# Altium PCB Proyecto_receptaculo_placa_externa_PCB.PcbDoc (part 1 of 2)
Units mm, origin at the board's own origin, x right, y up, seen from the top; angles counter-clockwise.
Board outline 92.2 x 97.18 mm, 4 copper layers (Top Layer, Sources, Ground, Bottom Layer), stack 0.603 mm thick; 84 components, 60 nets, 307 pads, 76 vias.
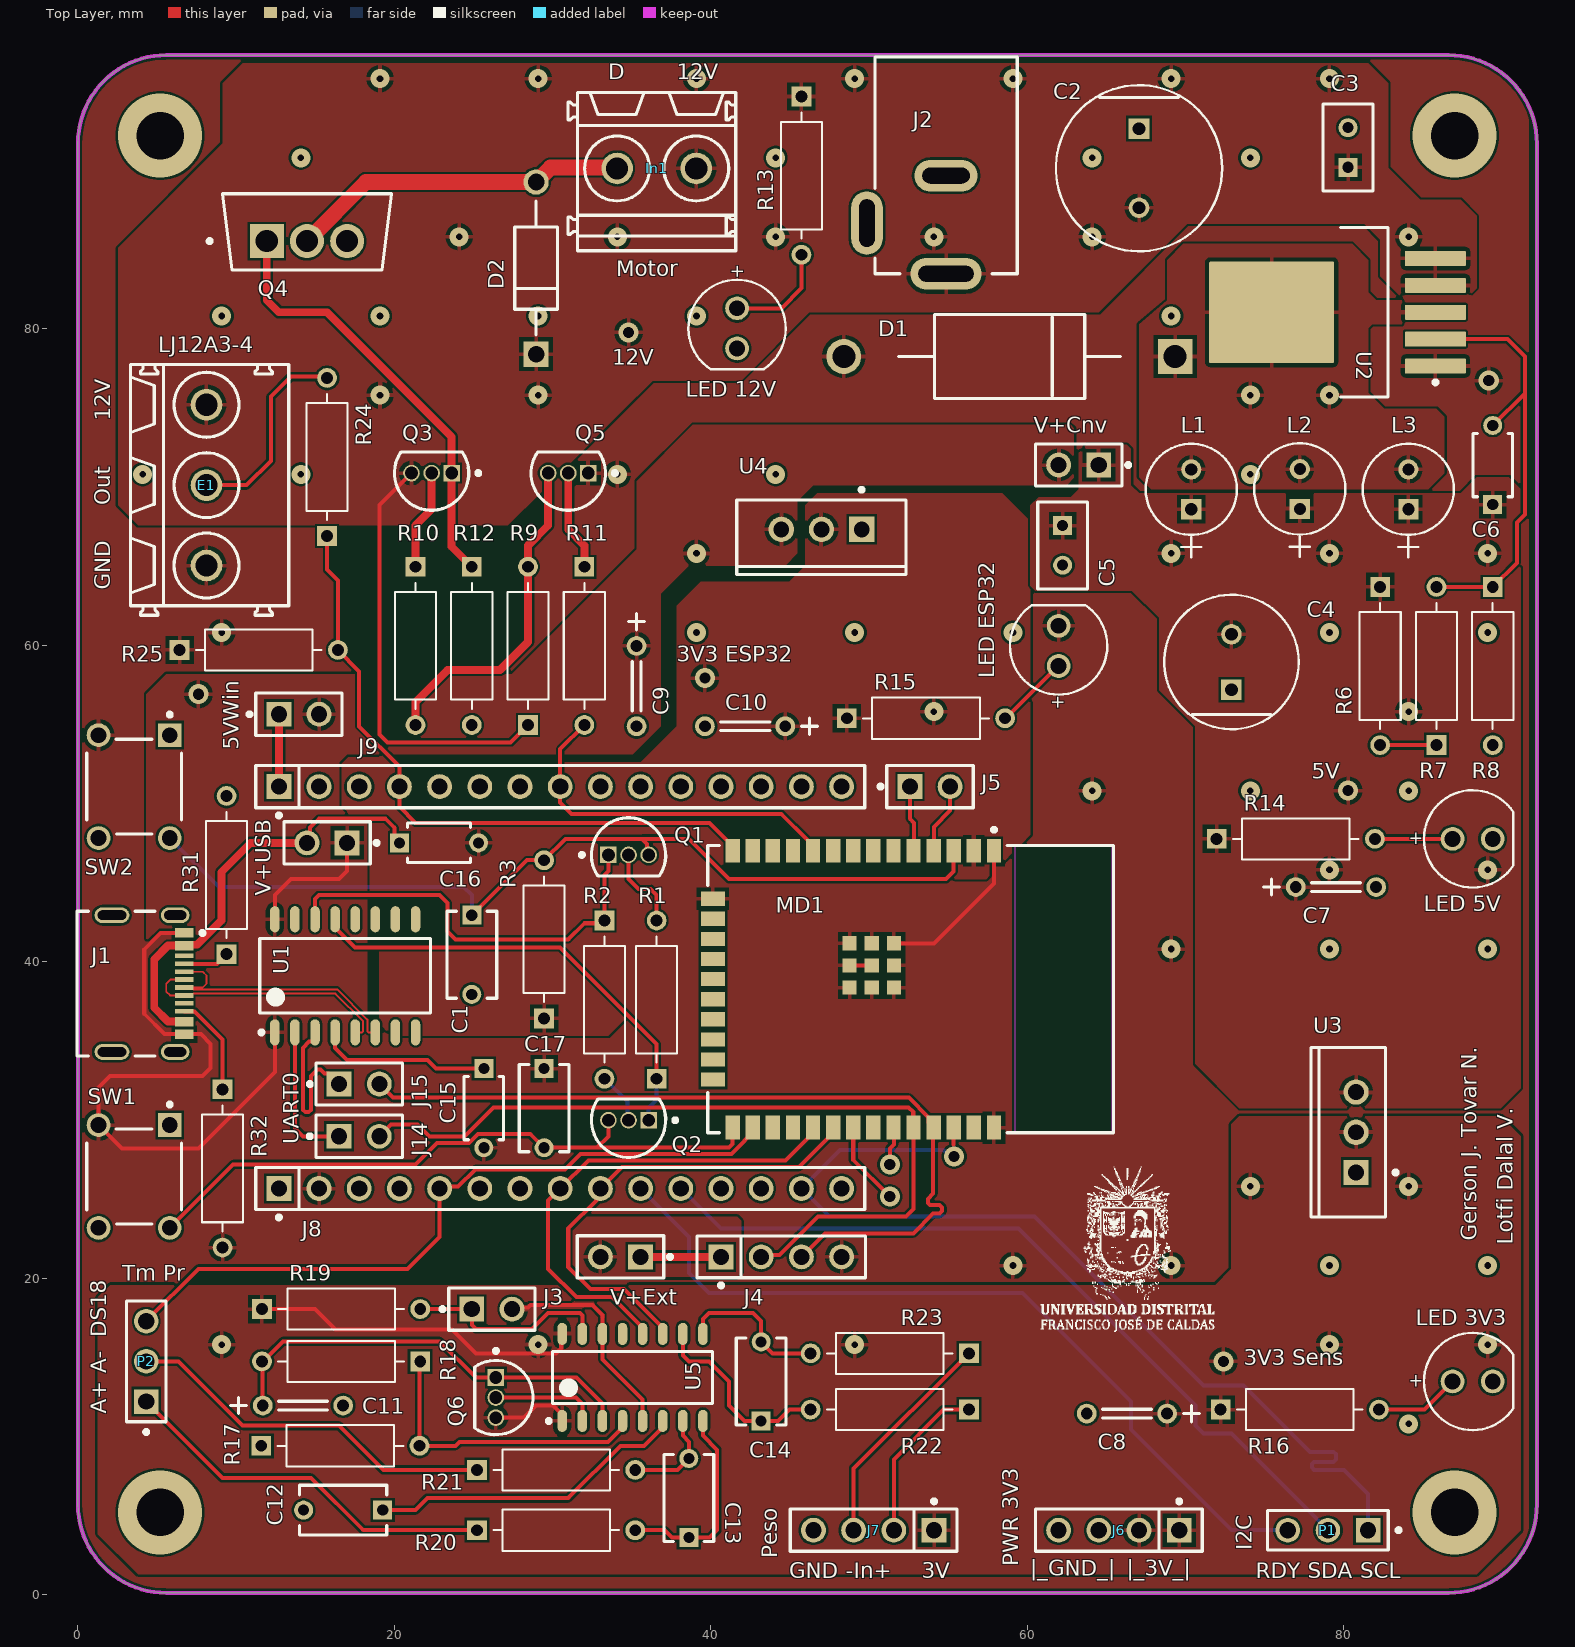
[diagram p0: Top Layer view]
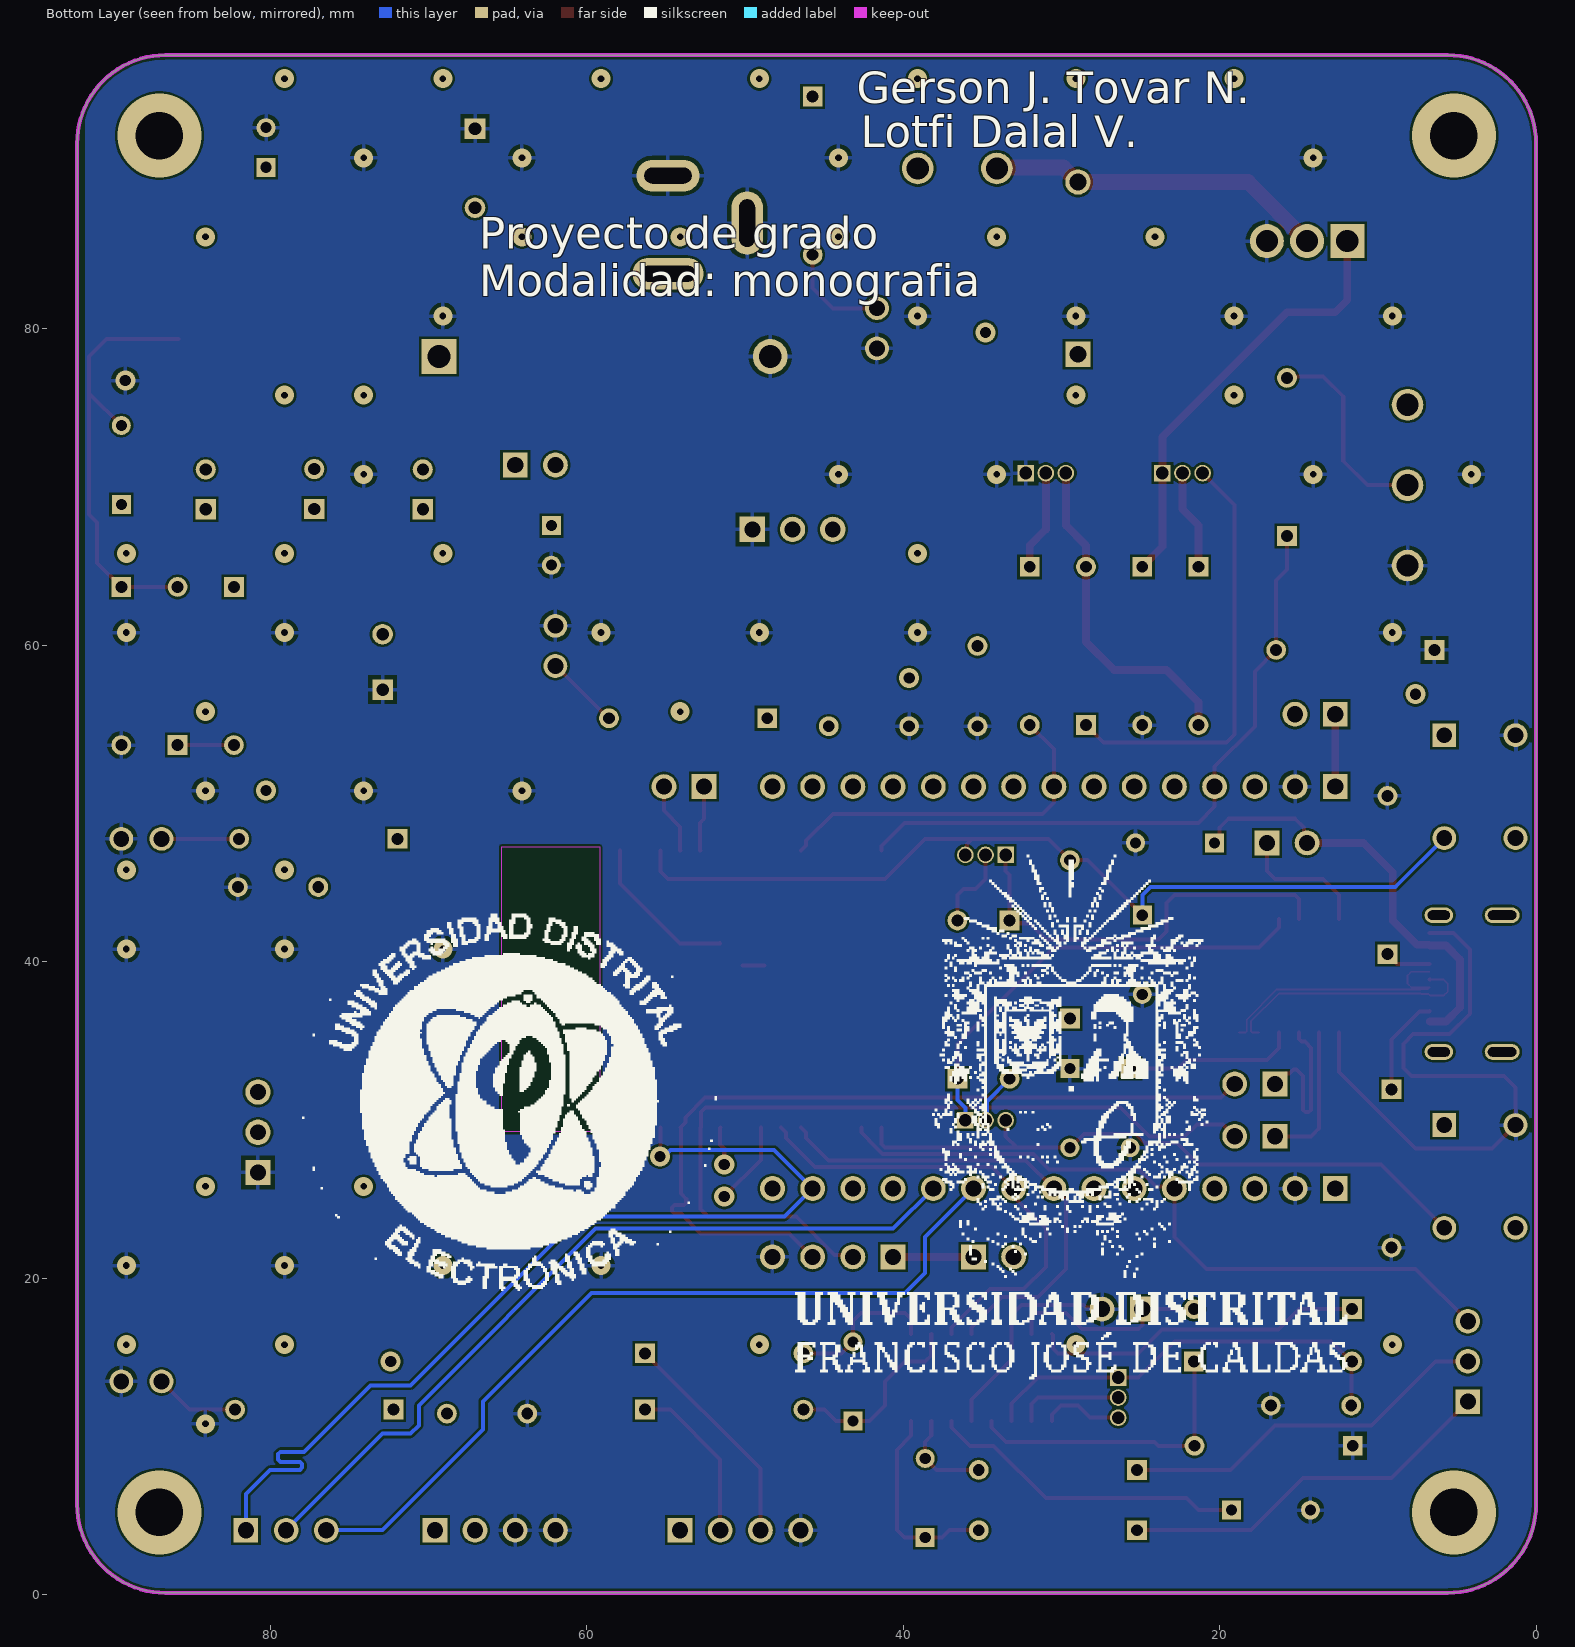
[diagram p1: Bottom Layer view, seen from below]
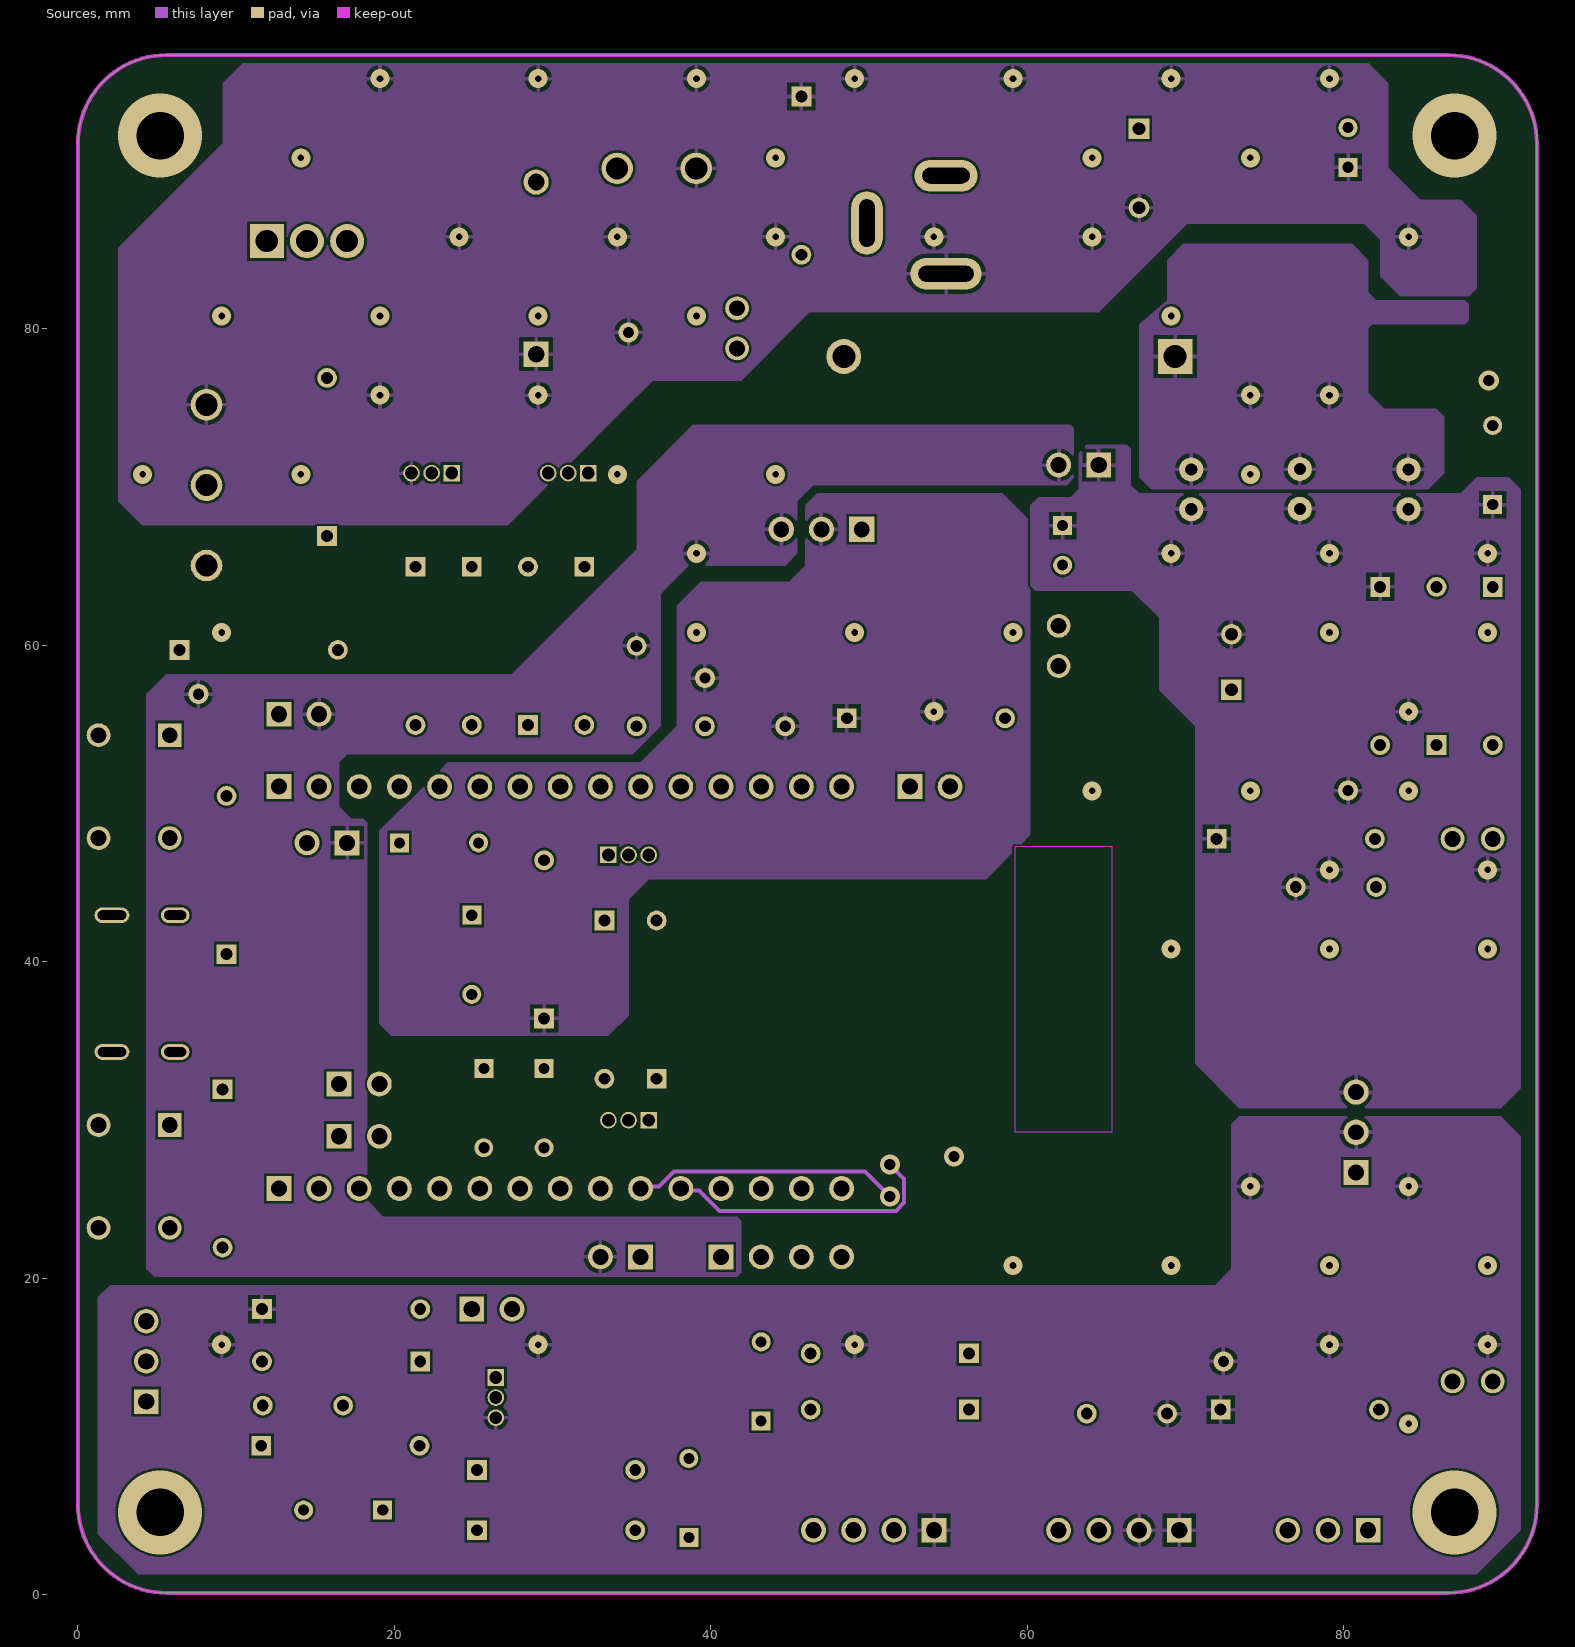
[diagram p2: Sources]
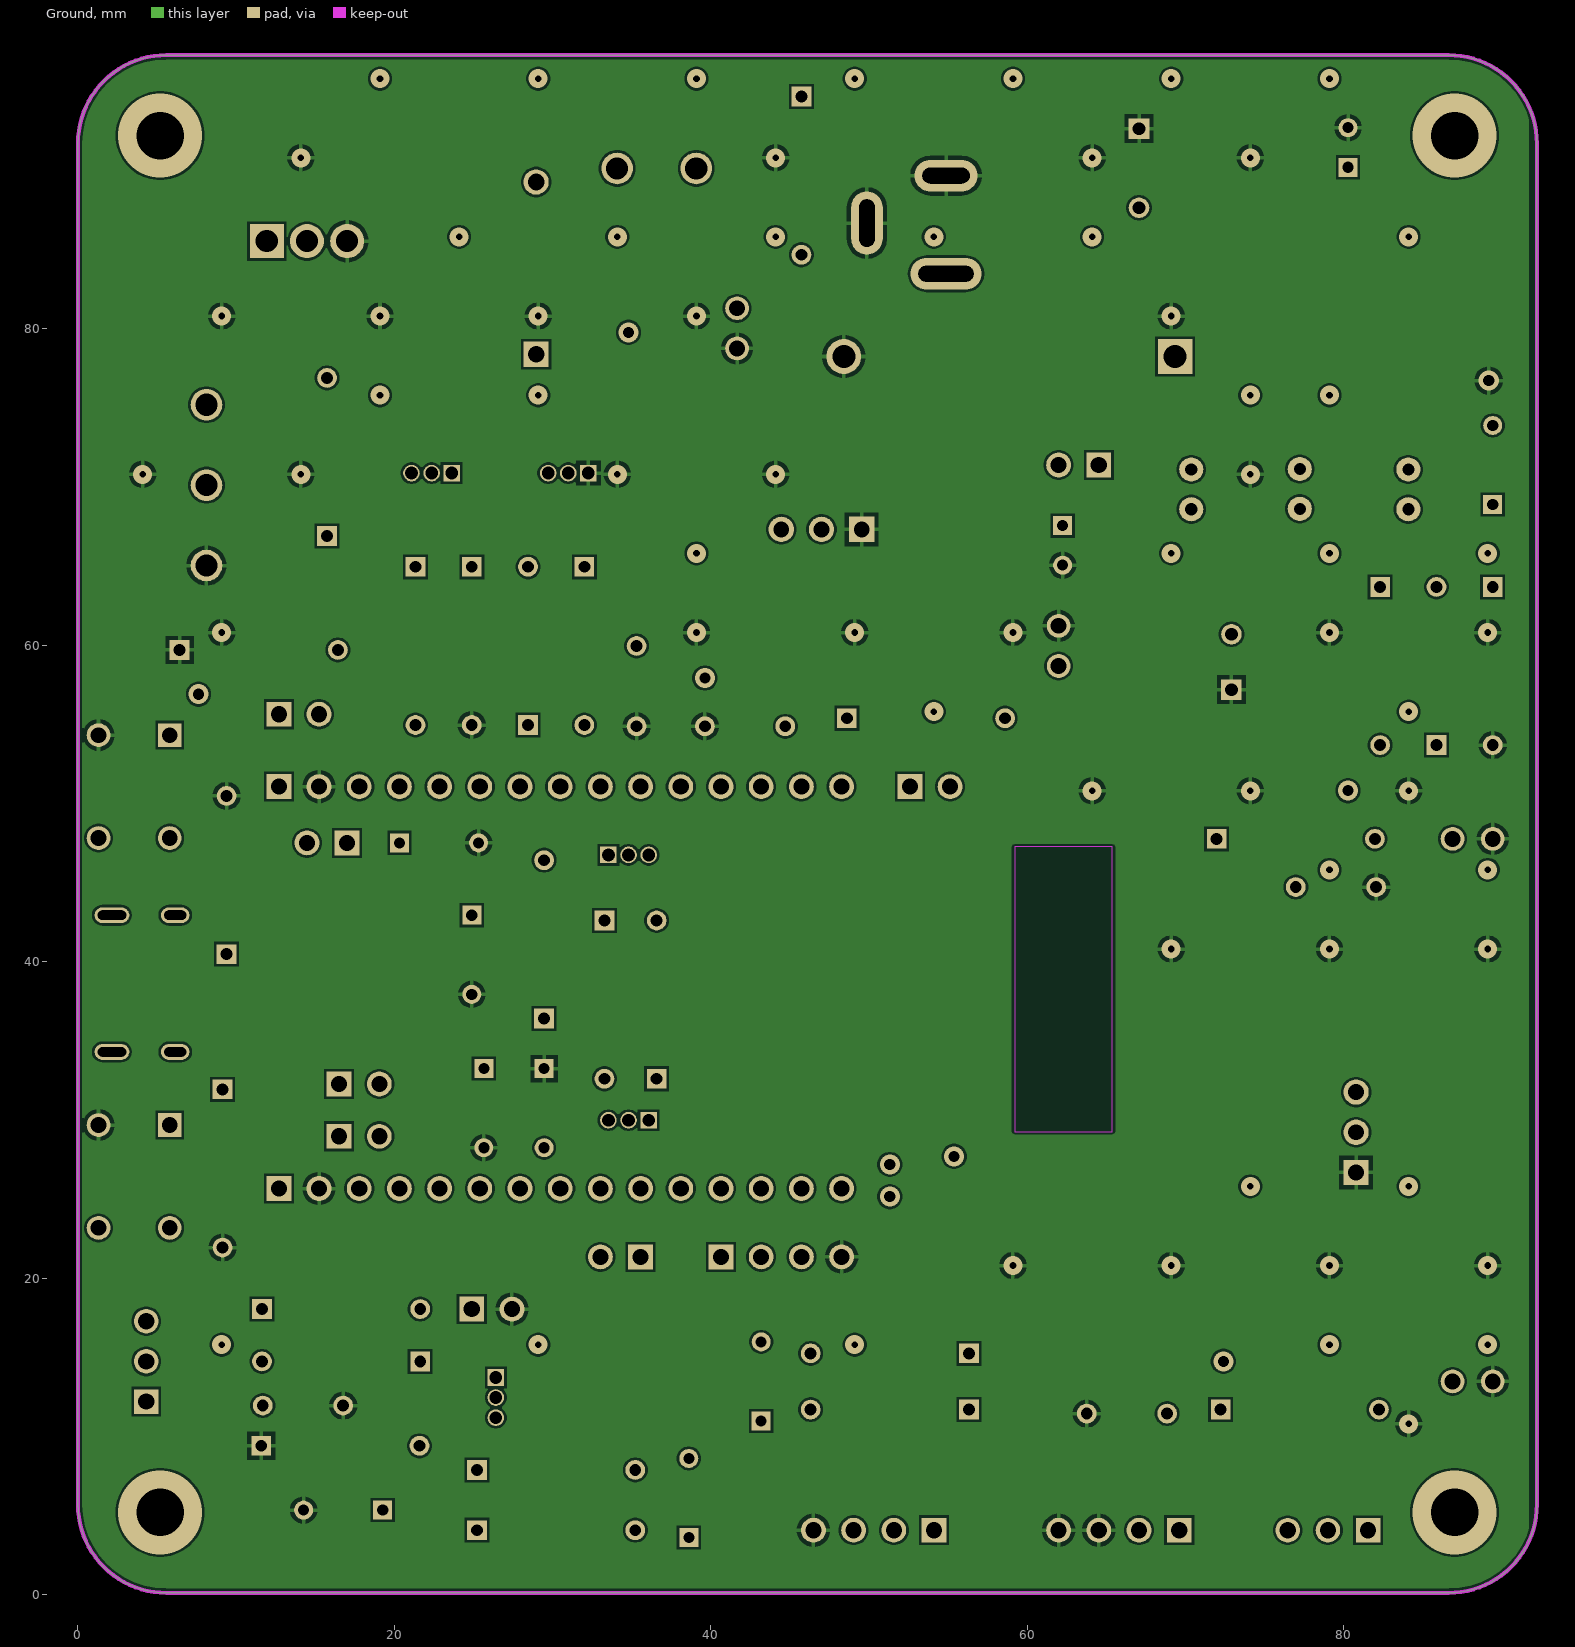
[diagram p3: Ground]
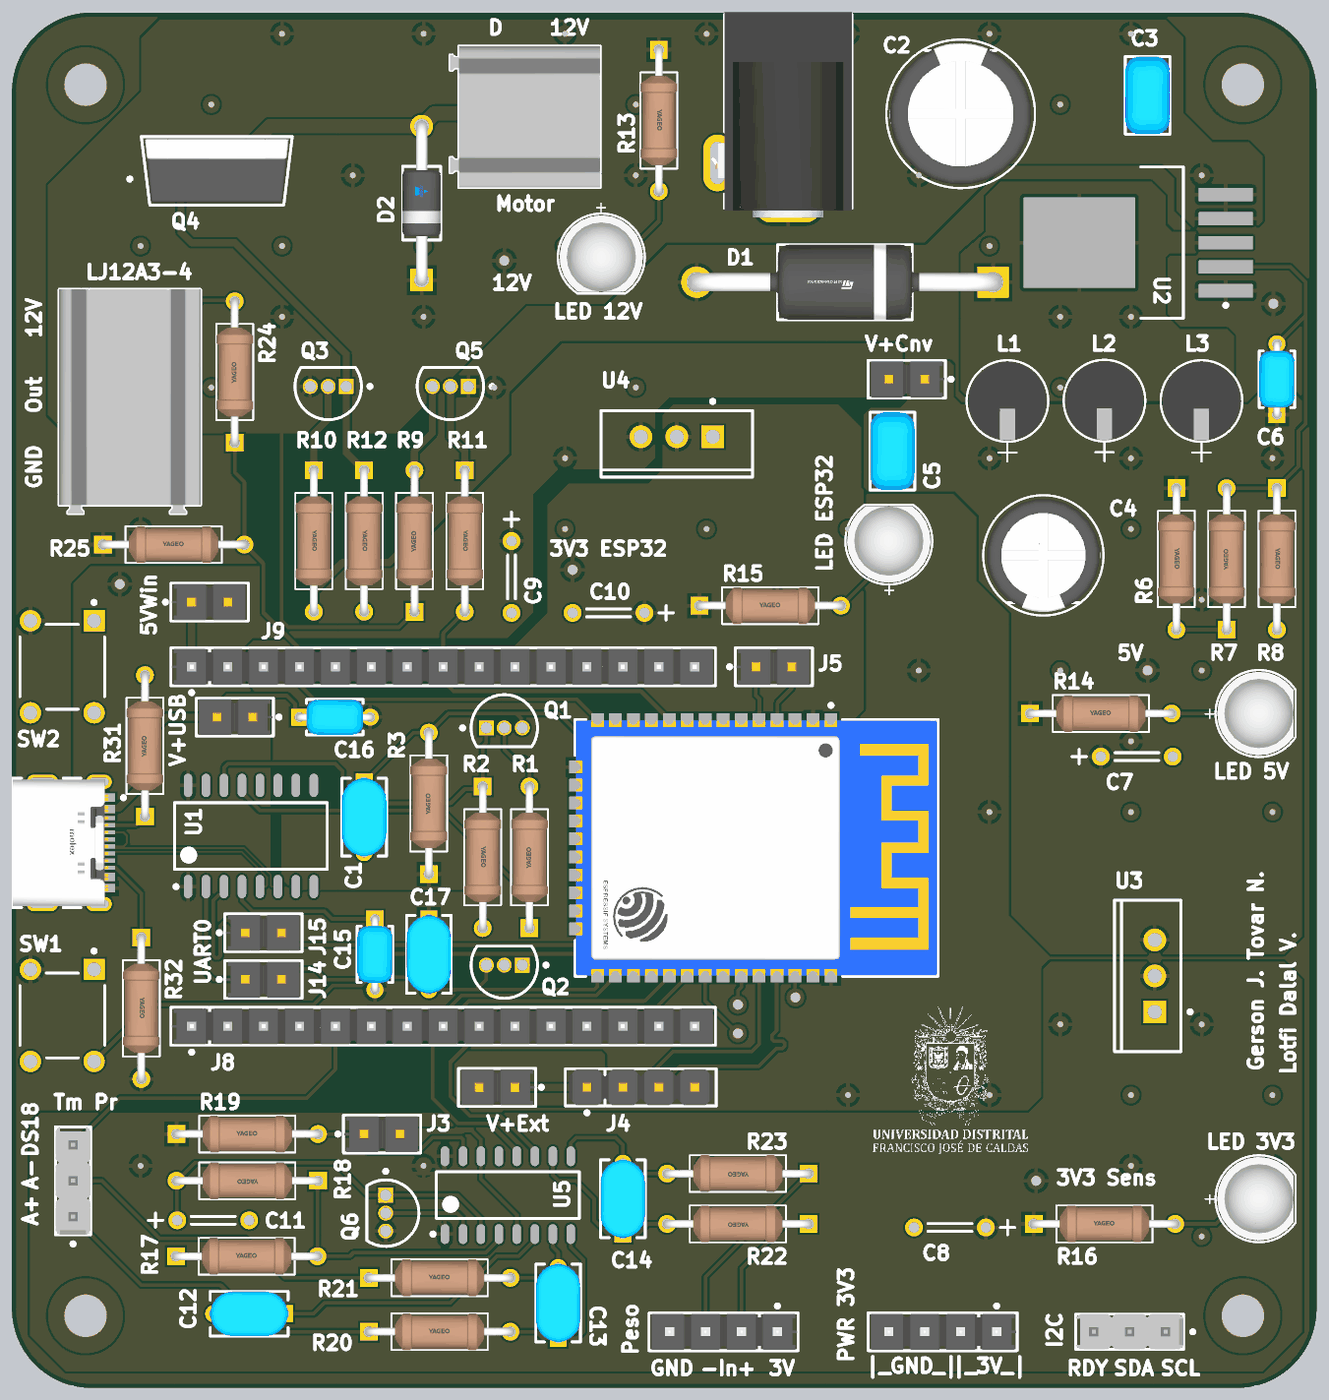
[diagram p4: 3D render of the assembled board from above, using the file's embedded part models]

## Layer stack, top to bottom
Top Solder: solder mask 0.0102, Solder Resist, Dk 3.5
Top Layer: signal copper 0.0356
Dielectric 2: prepreg 0.0711, PP-006, Dk 4.1
Sources: signal copper 0.035
Dielectric 1: dielectric 0.32, FR-4, Dk 4.8
Ground: signal copper 0.035
Dielectric 3: prepreg 0.0711, PP-006, Dk 4.1
Bottom Layer: signal copper 0.0356
Bottom Solder: solder mask 0.0102, Solder Resist, Dk 3.5

## Board outline
5.592,0.102 cw(c5.592,5.69) 0.004,5.69 0.004,91.69 cw(c5.592,91.69) 5.592,97.278 86.614,97.278 cw(c86.614,91.69) 92.202,91.69 92.202,58.42 92.202,5.69 cw(c86.614,5.69) 86.614,0.102

## Design rules (kind name [scope] priority, off if disabled: settings)
Clearance "Stitching GND2" [IsStitchingVia and InNet('GND2') vs (IsVia and (Not IsStitchingVia)) Or IsPad] p1: gap=0.127 ignorepadtopadclearanceinfootprint=TRUE
Clearance "Stitching NetD1_1" [IsStitchingVia and InNet('NetD1_1') vs (IsVia and (Not IsStitchingVia)) Or IsPad] p2: gap=0.127 ignorepadtopadclearanceinfootprint=FALSE
Clearance [All] p3: gap=0.15 ignorepadtopadclearanceinfootprint=TRUE
DiffPairsRouting [All] p1: maxlimit=0.15 minlimit=0.15 mostfreqgap=0.15 toplayer_minwidth=0.117 toplayer_maxwidth=0.117 toplayer_prefwidth=0.117 midlayer1_minwidth=0.064 midlayer1_maxwidth=0.064 midlayer1_prefwidth=0.064 midlayer2_minwidth=0.064 midlayer2_maxwidth=0.064 midlayer2_prefwidth=0.064 bottomlayer_minwidth=0.117 bottomlayer_maxwidth=0.117 bottomlayer_prefwidth=0.117 impedanceprofiledriven=TRUE impedanceprofileid={A861571A-2005-4FA9-A850-810DE9817C21} impedanceprofilevalue=90.000000 maxuncoupledlength=12.7
HoleSize [All] p1: absolutevalues=TRUE maxlimit=5 minlimit=0.3 maxpercent=80.000 minpercent=20.000
MinimumSolderMaskSliver [All] p1: minsoldermaskwidth=0
PasteMaskExpansion [All] p1: expansion=0 thpadusetoppaste=TRUE thpadusebottompaste=TRUE
PolygonConnect [All] p1: connectstyle=Relief reliefconductorwidth=0.254 reliefentries=4 polygonreliefangle="90 Angle" airgapwidth=0.254
RoutingVias [All] p1: holewidth=0.711 width=1.27 viastyle="Through Hole" minholewidth=0.3 minwidth=1.27 maxholewidth=5 maxwidth=5.2
SilkToSilkClearance [All] p1: silktosilkclearance=0
SilkToSolderMaskClearance [IsPad] p1: minsilkscreentomaskgap=0 clearancetoexposedcopper=TRUE
SolderMaskExpansion [InComponent('No Component')] p1: expansion=0.102 istentingtop=TRUE
SolderMaskExpansion SolderMaskExpansion_Vias [IsVia] p2: expansion=0.102 istentingtop=TRUE
SupplyNets "Schematic Supply Nets_9" [InNet('5V_Winner')] p1: voltage=0.000
SupplyNets "Schematic Supply Nets_8" [InNet('VCC_USB')] p2: voltage=0.000
SupplyNets "Schematic Supply Nets_7" [InNet('3V3_LDO_Sens')] p3: voltage=0.000
SupplyNets "Schematic Supply Nets_6" [InNet('GND')] p4: voltage=0.000
SupplyNets "Schematic Supply Nets_5" [InNet('+12_Vin')] p5: voltage=0.000
SupplyNets "Schematic Supply Nets_4" [InNet('3V3_LDO_EPS32')] p6: voltage=0.000
SupplyNets "Schematic Supply Nets_1" [InNet('5V_DC-DC')] p7: voltage=0.000
SupplyNets "Schematic Supply Nets" [InNet('5V_EXTERN')] p8: voltage=0.000
UnRoutedNet [InNet('No Net')] p1:
Width [All] p1: maxlimit=5 minlimit=0.116 preferedwidth=0.254
23 further rules are at their usual default settings.

## Classes and differential pairs
component class Sensores_ADCs_Sheet: C11 C12 C13 C14 E1 J3 J6 J7 P1 P2 Q6 R17 R18 R19 R20 R21 R22 R23 R24 R25 U5
component class ESP32WROOM_Sheet: 5VWin C1 C15 C16 C17 J1 J4 J5 J8 J9 J14 J15 MD1 Q1 Q2 R1 R2 R3 R31 R32 SW1 SW2 U1
component class Driver_Motor_Sheet: D2 In1 Q3 Q4 Q5 R9 R10 R11 R12
component class Alimentacion_Sheet: C2 C3 C4 C5 C6 C7 C8 C9 C10 D1 D3 D4 D5 D6 J2 L1 L2 L3 "LED 3V3" "LED 3V3 ESP32" "LED 5V" "LED 12V" "LED ESP32" R6 R7 R8 R13 R14 R15 R16 U2 U3 U4 V+Cnv V+Ext V+USB

## Components (designator, comment, footprint, x,y, rotation, side; value= is the part's Value field where it differs from the comment)
5VWin "TSW-102-07-L-S" FP-TSW-102-07-L-S-MFG 13.97,55.626 r0 top
C1 "RDER72E104K2K1H03B" FP-RDE2M1-MFG 24.892,40.426 r270 top
C2 "EEUFR1H221B" FP-RAD-TH-D_10_0_5-L_16_1-MFG 67.056,90.13 r270 top
C3 "RCER72A105K2A2H03B" FP-RCE2A2-MFG 80.264,91.44 r90 top
C4 "EEUHD1E331" FP-RAD-TH-D_8_0_5-L_11_5-MFG 72.898,58.928 r90 top
C5 "RCER72A105K2A2H03B" FP-RCE2A2-MFG 62.23,66.294 r270 top
C6 "RCER72A333K1M1H03A" FP-RCE1K1-2_5-MFG 89.408,71.374 r90 top
C7 "T352E475K035AT" KEMT-T352_E_V 79.502,44.704 r0 top
C8 "T352E475K035AT" KEMT-T352_E_V 66.294,11.43 r180 top
C9 "T352E475K035AT" KEMT-T352_E_V 35.306,57.404 r270 top
C10 "T352E475K035AT" KEMT-T352_E_V 42.164,54.864 r180 top
C11 "T352E475K035AT" KEMT-T352_E_V 14.224,11.938 r0 top
C12 "RDER72E104K2K1H03B" FP-RDE2M1-MFG 16.764,5.334 r180 top
C13 "RDER72E104K2K1H03B" FP-RDE2M1-MFG 38.608,6.096 r90 top
C14 "RDER72E104K2K1H03B" FP-RDE2M1-MFG 43.18,13.462 r90 top
C15 "RCER72A104K1K1H03B" FP-RCE1K1-2_5-MFG 25.654,30.734 r270 top
C16 "RCER72A104K1K1H03B" FP-RCE1K1-2_5-MFG 22.82,47.498 r0 top
C17 "RDER72E104K2K1H03B" FP-RDE2M1-MFG 29.464,30.734 r270 top
D1 "1N5822" FP-DO-201AD-MFG 58.872,78.232 r180 top
D2 "1N5819-E3/54" FP-1N5819-E3-54-MFG 28.956,83.82 r90 top
E1 "1716090000" LM_5_08_90_03 8.328,70.104 r270 top
In1 "1715310000" LM_5_00_90_02 36.576,89.916 r180 top
J1 "217179-0001" FP-2171790001-MFG 3.302,38.608 r270 top
J2 "KLDX-0202-B" KYCN-KLDX-0202-B_V 54.864,97.162 r270 top
J3 "TSW-102-07-L-S" FP-TSW-102-07-L-S-MFG 26.162,18.034 r0 top
J4 "M20-9990445" FP-M20-9990445-MFG 44.45,21.336 r0 top
J5 "TSW-102-07-L-S" FP-TSW-102-07-L-S-MFG 53.848,51.054 r0 top
J6 "TSW-104-23-T-S" FP-TSW-104-23-T-S-MFG 65.786,4.064 r180 top
J7 "TSW-104-23-T-S" FP-TSW-104-23-T-S-MFG 50.292,4.064 r180 top
J8 "TSW-115-23-T-S" FP-TSW-115-23-T-S-MFG 30.48,25.654 r0 top
J9 "TSW-115-23-T-S" FP-TSW-115-23-T-S-MFG 30.48,51.054 r0 top
J14 "TSW-102-07-L-S" FP-TSW-102-07-L-S-MFG 17.78,28.956 r0 top
J15 "TSW-102-07-L-S" FP-TSW-102-07-L-S-MFG 17.78,32.258 r0 top
L1 "330 uH" IND_BOURNS_RLB0608 70.358,68.58 r90 top
L2 "330 uH" IND_BOURNS_RLB0608 77.216,68.605 r90 top
L3 "330 uH" IND_BOURNS_RLB0608 84.074,68.58 r90 top
"LED 3V3" "151051BS04000" WL-TMRC_D5.9H8.7 88.138,13.462 r0 top (schematic designator D6)
"LED 5V" "151051BS04000" WL-TMRC_D5.9H8.7 88.138,47.752 r0 top (schematic designator D4)
"LED 12V" "151051BS04000" WL-TMRC_D5.9H8.7 41.656,80.01 r270 top (schematic designator D3)
"LED ESP32" "151051BS04000" WL-TMRC_D5.9H8.7 61.976,59.944 r90 top (schematic designator D5)
MD1 "ESP32-WROOM-32E (16MB)" FP-ESP32-WROOM-32E_16MB-MFG 52.628,38.254 r270 top
P1 "22-28-4033" MOLX-22-28-4033_V 78.994,4.064 r180 top
P2 "22-28-4033" MOLX-22-28-4033_V 4.318,14.732 r90 top
Q1 "2N2222A331" TO-92 34.798,46.736 r0 top
Q2 "2N2222A331" TO-92 34.798,29.972 r180 top
Q3 "BC328" TO-92 22.352,70.866 r180 top
Q4 "IRFZ44NLPBF" FP-PG-TO262-3-MFG 14.478,86.106 r90 top
Q5 "2N2222A331" TO-92 30.988,70.866 r180 top
Q6 "BC328" TO-92 26.416,12.446 r270 top
R1 "FMP100JT-52-1K" FP-FMP100-MFG 36.576,37.592 r90 top
R2 "FMP100JT-52-1K" FP-FMP100-MFG 33.274,37.592 r270 top
R3 "10 kOhms" FP-FMP100-MFG 29.464,41.402 r90 top
R6 "15 kOmhs" FP-FMP100-MFG 82.296,58.674 r270 top
R7 "1 kOhms" FP-FMP100-MFG 85.852,58.674 r90 top
R8 "3 kOhms" FP-FMP100-MFG 89.408,58.674 r270 top
R9 "5.6 kOhms" FP-FMP100-MFG 28.448,59.944 r90 top
R10 "1 kOhms" FP-FMP100-MFG 21.336,59.944 r270 top
R11 "10 kOhms" FP-FMP100-MFG 32.004,59.944 r270 top
R12 "2 kOhms" FP-FMP100-MFG 24.892,59.944 r270 top
R13 "2.2 kOhms" FP-FMP100-MFG 45.72,89.662 r270 top
R14 "1 kOhms" FP-FMP100-MFG 76.962,47.752 r0 top
R15 "1 kOhms" FP-FMP100-MFG 53.594,55.372 r0 top
R16 "1 kOhms" FP-FMP100-MFG 77.216,11.684 r0 top
R17 "3.4 kOhms" FP-FMP100-MFG 16.59,9.398 r0 top
R18 "1 kOhms" FP-FMP100-MFG 16.632,14.732 r180 top
R19 "10 kOhms" FP-FMP100-MFG 16.632,18.034 r0 top
R20 "100 Ohms" FP-FMP100-MFG 30.226,4.064 r0 top
R21 "100 Ohms" FP-FMP100-MFG 30.226,7.874 r0 top
R22 "100 Ohms" FP-FMP100-MFG 51.308,11.684 r180 top
R23 "100 Ohms" FP-FMP100-MFG 51.308,15.24 r180 top
R24 "300 kOhms" FP-FMP100-MFG 15.748,71.882 r90 top
R25 "120 kOhms" FP-FMP100-MFG 11.43,59.69 r0 top
R31 "5.1 kOhms" FP-FMP100-MFG 9.398,45.466 r90 top
R32 "5.1 kOhms" FP-FMP100-MFG 9.144,26.924 r270 top
SW1 "1825910-6" TECO-1825910-6_V 3.556,26.416 r270 top
SW2 "1825910-6" TECO-1825910-6_V 3.556,51.054 r270 top
U1 "CH340C" "SOP-16 (SOP127P780X190-16N)" 16.891,39.097 r90 top
U2 "XL5004E1" RO263-5L 78.699,89.027 r180 top
U3 "LM1117T-3.3/NOPB" NDE0003A 80.772,29.21 r90 top
U4 "LM1117T-3.3/NOPB" NDE0003A 46.99,67.31 r180 top
U5 "HX711" "SOP-16L (SOP127P600-8N)" 35.052,13.716 r90 top
V+Cnv "TSW-102-07-L-S" FP-TSW-102-07-L-S-MFG 63.246,71.374 r180 top
V+Ext "TSW-102-07-L-S" FP-TSW-102-07-L-S-MFG 34.29,21.336 r180 top
V+USB "TSW-102-07-L-S" FP-TSW-102-07-L-S-MFG 15.748,47.498 r180 top

## Footprints (in the part's own frame and the unit in brackets; to place one, negate y for a bottom-side part, rotate by r counter-clockwise, add the part's x,y. Pads: shape width x height; smd on the part's side, far side on the other; paste and mask are expansions set on the pad)
FP-1N5819-E3-54-MFG [mm]
  rect 1.6x1.6 hole 1.05 paste-2539.97 mask+0: 1(-5.438,0)
  round 1.6 hole 1.05 paste-2539.97 mask+0: 2(5.438,0)
  silkscreen extent -4.24,-1.35 4.24,1.35, body extent -6.34,-1.45 6.34,1.45, height 0.25
FP-2171790001-MFG [mm]
  rrect100% 1x1.8 hole 1.4 slot 0.6 at 0 deg paste-2539.97 mask+0: 1(-4.32,2.85) 2(4.32,2.85)
  rrect100% 1x2.2 hole 1.8 slot 0.6 at 0 deg paste-2539.97 mask+0: 3(-4.32,-1.15) 4(4.32,-1.15)
  rect 0.6x1.15 smd paste+0 mask+0: A1-B12(-3.2,3.425) A4-B9(-2.4,3.425) B1-A12(3.2,3.425) B4-A9(2.4,3.425)
  rect 0.3x1.15 smd paste+0 mask+0: A5(-1.25,3.425) A6(-0.25,3.425) A7(0.25,3.425) A8(1.25,3.425) B5(1.75,3.425) B6(0.75,3.425) B7(-0.75,3.425) B8(-1.75,3.425)
  silkscreen extent -4.57,-3.35 4.57,4.7, body extent -4.92,-3.45 4.92,4.1, height 0.25
FP-DO-201AD-MFG [mm]
  rect 2.2x2.2 hole 1.45 paste-2539.97 mask+0: 1(-10.47,0)
  round 2.2 hole 1.45 paste-2539.97 mask+0: 2(10.47,0)
  silkscreen extent -7,-2.65 7,2.65, body extent -11.67,-2.75 11.67,2.75, height 0.25
FP-ESP32-WROOM-32E_16MB-MFG [mm]
  rect 1.5x0.9 smd paste+0 mask+0: 1(-8.75,5.26) 2(-8.75,3.99) 3(-8.75,2.72) 4(-8.75,1.45) 5(-8.75,0.18) 6(-8.75,-1.09) 7(-8.75,-2.36) 8(-8.75,-3.63) 9(-8.75,-4.9) 10(-8.75,-6.17) 11(-8.75,-7.44) 12(-8.75,-8.71) 13(-8.75,-9.98) 14(-8.75,-11.25) 25(8.75,-11.25) 26(8.75,-9.98) 27(8.75,-8.71) 28(8.75,-7.44) 29(8.75,-6.17) 30(8.75,-4.9) 31(8.75,-3.63) 32(8.75,-2.36) 33(8.75,-1.09) 34(8.75,0.18) 35(8.75,1.45) 36(8.75,2.72) 37(8.75,3.99) 38(8.75,5.26)
  rect 0.9x1.5 smd paste+0 mask+0: 15(-5.715,-12.5) 16(-4.445,-12.5) 17(-3.175,-12.5) 18(-1.905,-12.5) 19(-0.635,-12.5) 20(0.635,-12.5) 21(1.905,-12.5) 22(3.175,-12.5) 23(4.445,-12.5) 24(5.715,-12.5)
  rect 0.9x0.9 smd paste+0 mask+0: 39(-2.9,-2.46) 39(-2.9,-1.06) 39(-2.9,-3.86) 39(-1.5,-1.06) 39(-1.5,-2.46) 39(-1.5,-3.86) 39(-0.1,-1.06) 39(-0.1,-2.46) 39(-0.1,-3.86)
  Keep-Out Layer region: -9.002,6.56 8.998,6.56 8.998,12.75 -9.002,12.75
  silkscreen extent -10.2,-12.83 9.08,12.83, body extent -9.6,-13.35 9.6,12.93, height 0.25
FP-FMP100-MFG [mm]
  rect 1.25x1.25 hole 0.75 paste-2539.97 mask+0: 1(-5,0)
  round 1.25 hole 0.75 paste-2539.97 mask+0: 2(5,0)
  silkscreen extent -3.98,-1.3 3.98,1.3, body extent -5.72,-1.4 5.72,1.4, height 0.25
FP-M20-9990445-MFG [mm]
  rect 1.57x1.57 hole 1.02 paste-2539.97 mask+0: 1(-3.81,0)
  round 1.57 hole 1.02 paste-2539.97 mask+0: 2(-1.27,0) 3(1.27,0) 4(3.81,0)
  silkscreen extent -5.33,-1.92 5.33,1.32, body extent -5.43,-1.42 5.43,1.42, height 0.25
FP-PG-TO262-3-MFG [mm]
  rect 2.15x2.15 hole 1.4 paste-2539.97 mask+0: 1(-0.583,2.54)
  round 2.15 hole 1.4 paste-2539.97 mask+0: 2(-0.583,0) 3(-0.583,-2.54)
  silkscreen extent -2.41,-5.34 2.41,6.27, body extent -2.51,-5.56 2.51,5.56, height 0.25
FP-RAD-TH-D_8_0_5-L_11_5-MFG [mm]
  rect 1.3x1.3 hole 0.8 paste-2539.97 mask+0: 1(-1.75,0)
  round 1.3 hole 0.8 paste-2539.97 mask+0: 2(1.75,0)
  silkscreen extent -4.25,-4.25 4.25,4.25, body extent -4.35,-4.35 4.35,4.35, height 0.25
FP-RAD-TH-D_10_0_5-L_16_1-MFG [mm]
  rect 1.3x1.3 hole 0.8 paste-2539.97 mask+0: 1(-2.5,0)
  round 1.3 hole 0.8 paste-2539.97 mask+0: 2(2.5,0)
  silkscreen extent -5.25,-5.25 5.25,5.25, body extent -5.35,-5.35 5.35,5.35, height 0.25
FP-RCE1K1-2_5-MFG [mm]
  rect 1.2x1.2 hole 0.7 paste-2539.97 mask+0: 1(-2.5,0)
  round 1.2 hole 0.7 paste-2539.97 mask+0: 2(2.5,0)
  silkscreen extent -2,-1.25 2,1.25, body extent -3.2,-1.35 3.2,1.35, height 0.25
FP-RCE2A2-MFG [mm]
  rect 1.2x1.2 hole 0.7 paste-2539.97 mask+0: 1(-1.25,0)
  round 1.2 hole 0.7 paste-2539.97 mask+0: 2(1.25,0)
  silkscreen extent -2.75,-1.58 2.75,1.58, body extent -2.85,-1.68 2.85,1.68, height 0.25
FP-RDE2M1-MFG [mm]
  rect 1.2x1.2 hole 0.7 paste-2539.97 mask+0: 1(-2.5,0)
  round 1.2 hole 0.7 paste-2539.97 mask+0: 2(2.5,0)
  silkscreen extent -2.75,-1.58 2.75,1.58, body extent -3.2,-1.68 3.2,1.68, height 0.25
FP-TSW-102-07-L-S-MFG [mm]
  rect 1.57x1.57 hole 1.02 paste-2539.97 mask+0: 1(-1.27,0)
  round 1.57 hole 1.02 paste-2539.97 mask+0: 2(1.27,0)
  silkscreen extent -3.25,-1.34 2.73,1.34, body extent -2.83,-1.44 2.83,1.44, height 0.25
FP-TSW-104-23-T-S-MFG [mm]
  rect 1.57x1.57 hole 1.02 paste-2539.97 mask+0: 1(-3.81,0)
  round 1.57 hole 1.02 paste-2539.97 mask+0: 2(-1.27,0) 3(1.27,0) 4(3.81,0)
  silkscreen extent -5.27,-1.95 5.27,1.34, body extent -5.37,-1.44 5.37,1.44, height 0.25
FP-TSW-115-23-T-S-MFG [mm]
  rect 1.57x1.57 hole 1.02 paste-2539.97 mask+0: 1(-17.78,0)
  round 1.57 hole 1.02 paste-2539.97 mask+0: 2(-15.24,0) 3(-12.7,0) 4(-10.16,0) 5(-7.62,0) 6(-5.08,0) 7(-2.54,0) 8(0,0) 9(2.54,0) 10(5.08,0) 11(7.62,0) 12(10.16,0) 13(12.7,0) 14(15.24,0) 15(17.78,0)
  silkscreen extent -19.24,-1.95 19.24,1.34, body extent -19.34,-1.44 19.34,1.44, height 0.25
IND_BOURNS_RLB0608 [mil]
  rect 50x50 / inner round 60 / far side rect 50x50 hole 30 paste-99999 mask+0: 1(0,0)
  round 50 / inner round 60 / far side round 50 hole 30 paste-99999 mask+0: 2(99,0)
  silkscreen extent -119,-114 163,114, body extent -59,-108 157,108, height 296
KEMT-T352_E_V [mm] "THD, 2-Leads, Body 5.5x0.55mm, Height 11.7mm"
  round 1.25 hole 0.75: 1(-2.54,0) 2(2.54,0)
  silkscreen extent -4.58,-0.51 1.55,0.51, body extent -2.79,-0.27 2.79,0.28, height 8.95
KYCN-KLDX-0202-B_V [mm] "3 Conductor Jack, 9 x 14.5 mm Body"
  oval 2x4.5 hole 1 slot 3.5 at 90 deg: 1(13.7,0)
  oval 2x4 hole 1 slot 3 at 90 deg: 2(7.5,0)
  oval 4x2 hole 1 slot 3 at 0 deg: 3(10.5,-5)
  silkscreen extent 0,-4.5 13.7,4.5, body extent -0.15,-5 14.35,4.5, height 11
LM_5_00_90_02 [mm] "OMNIMATE Signal - Serie LM  LM 5.00/02/90 3.5"
  round 2 hole 1.4: A1(-2.5,-0.2) A2(2.5,-0.2)
  silkscreen extent -5,-5 5.6,5, body extent -5,-5 5.6,5, height 13.81
LM_5_08_90_03 [mm] "OMNIMATE Signal - Serie LM  LM 5.08/03/90 3.5"
  round 2 hole 1.4: A1(-5.08,-0.2) A2(0,-0.2) A3(5.08,-0.2)
  silkscreen extent -7.62,-5 8.22,5, body extent -7.62,-5 8.22,5, height 13.81
MOLX-22-28-4033_V [mm] "THD, 3-Leads, Body 7.62x2.49mm, Pitch 2.54mm"
  rect 1.55x1.55 hole 1.02: 1(-2.54,0)
  round 1.55 hole 1.02: 2(0,0) 3(2.54,0)
  silkscreen extent -4.59,-1.24 3.81,1.24, body extent -3.81,-1.24 3.81,1.24, height 8.38
NDE0003A [mm] "FM, 3-Leads, Body 10.7x4.7mm, Pitch 2.54mm"
  rect 1.6x1.6 hole 1: 1(-2.54,0)
  round 1.6 hole 1: 2(0,0) 3(2.54,0)
  silkscreen extent -5.35,-2.63 5.35,2.85, body extent -5.4,-1.9 5.4,2.9, height 19.4
RO263-5L [mm]
  rrect11% 3.85x0.95 smd: 1(-7.089,11.401) 2(-7.089,9.701) 3(-7.089,8.001) 4(-7.089,6.301) 5(-7.089,4.601)
  rrect2% 7.9x6.4 smd: 6(3.261,8.001)
  silkscreen extent -7.21,2.65 -1.09,13.35, body extent -4.09,2.68 5.56,13.33, height 4.83
"SOP-16 (SOP127P780X190-16N)" [mm] "SOP, 16-Leads, Body 10,55x5,30mm, Pitch 1,27mm, IPC Medium Density"
  oval 1.65x0.6 smd: 1(-3.575,4.445) 2(-3.575,3.175) 3(-3.575,1.905) 4(-3.575,0.635) 5(-3.575,-0.635) 6(-3.575,-1.905) 7(-3.575,-3.175) 8(-3.575,-4.445) 9(3.575,-4.445) 10(3.575,-3.175) 11(3.575,-1.905) 12(3.575,-0.635) 13(3.575,0.635) 14(3.575,1.905) 15(3.575,3.175) 16(3.575,4.445)
  silkscreen extent -3.7,-5.4 2.35,5.42, body extent -2.75,-5.4 2.75,5.4, height 1.9
"SOP-16L (SOP127P600-8N)" [mm]
  oval 1.4x0.6 smd: 1(-2.75,4.445) 2(-2.75,3.175) 3(-2.75,1.905) 4(-2.75,0.635) 5(-2.75,-0.635) 6(-2.75,-1.905) 7(-2.75,-3.175) 8(-2.75,-4.445) 9(2.75,-4.445) 10(2.75,-3.175) 11(2.75,-1.905) 12(2.75,-0.635) 13(2.75,0.635) 14(2.75,1.905) 15(2.75,3.175) 16(2.75,4.445)
  silkscreen extent -2.87,-5.05 1.65,5.42, body extent -2.05,-5.05 2.05,5.05, height 1.9
TECO-1825910-6_V [mm] "Switch, 4-Leads, Body 5.99x5.99mm"
  rect 1.5x1.5 hole 0.99: 1(-3.25,2.25)
  round 1.5 hole 0.99: 2(3.25,2.25) 3(-3.25,-2.25) 4(3.25,-2.25)
  silkscreen extent -4.67,-2.99 2.99,3, body extent -3,-2.99 2.99,3, height 5
TO-92 [mm]
  rect 1.05x1.05 hole 0.8: 1(-1.27,0)
  round 1.05 hole 0.8: 2(0,0) 3(1.27,0)
  silkscreen extent -3.07,-1.34 2.35,2.35, body extent -2.35,-1.33 2.36,2.36, height 7.87
WL-TMRC_D5.9H8.7 [mm] "THT Mono-color Round Color LED, 2-leads"
  round 1.5 hole 1: 1(-1.27,0) 2(1.27,0)
  silkscreen extent -3.07,-3.07 2.58,3.08, body extent -2.95,-2.95 2.45,2.95, height 9.2

## Part data
5VWin J3 J5 J14 J15 V+Cnv V+Ext V+USB: library part CMP-02766-001428-1, "CONN HEADER VERT 2POS 2.54MM", Color=Black, Current Rating=7.6A, Max Operating Temperature=125°C, Max Voltage Rating (AC)=550V, Min Operating Temperature=-55°C, Package Quantity=1, Connector Type="Male Pin", Contact Material=Bronze, Contact Mating Length=0.23inch, Contact Plating=Gold, Contact Type="Male Pin", Depth=2.54mm, Gender=Male, Housing Color=Black, Housing Material=Polyester, Lead Free="Lead Free", Length=5.08mm, Max Current Rating=7.6A, Mount="Through Hole", Number of Contacts=2, Number of Positions=2, Number Of Rows=1, Orientation=Straight, Packaging=Bulk, Pitch=2.54mm, Radiation Hardening=No, REACH SVHC="No SVHC", RoHS Compliant=Yes, Series=TSW, Termination=Solder, Voltage Rating=550V, Width=2.54mm
C1 C12 C13 C14 C17: library part CMP-06035-020184-1, "Ceramic Capacitor 100nF ±10% 250V X7R Radial", Capacitance=100nF, Case/Package=Radial, Dielectric=X7R, Max Operating Temperature=125°C, Min Operating Temperature=-55°C, Package Quantity=500, Resistor Type=Ceramic, Tolerance=10%, Voltage Rating=250V, Height=4mm, Height - Seated (Max)=0.236inch, Lead Diameter=0.5mm, Lead Free="Lead Free", Lead Pitch=0.197inch, Lead/Base Style=Kinked, Length=5.5mm, Mount="Through Hole", Packaging=Bulk, Termination=Radial, Voltage Rating (DC)=250V, Width=0.124inch
C2: library part CMP-05427-000403-1, "Aluminum Electrolytic Capacitors (Radial Lead Type) 220uF ±20% 50V", Capacitance=220uF, Case/Package=Radial, ESR (Equivalent Series Resistance)=30mR, Max Operating Temperature=105°C, Min Operating Temperature=-40°C, Package Quantity=1, Ripple Current=1.65A, Tolerance=20%, Voltage Rating=50V, Contact Plating=Tin, Diameter=10mm, Features="General Purpose", Height=16mm, Height - Seated (Max)=0.689inch, Impedance=30mR, Lead Diameter=0.6mm, Lead Free="Lead Free", Lead Pitch=5mm, Length=16mm, Life (Hours)=8000Hour, Mount="Through Hole", Number of Pins=2, Packaging="Ammo Pack", Radiation Hardening=No, REACH SVHC="No SVHC", RoHS Compliant=Yes, Series=FR, Termination=Radial, Voltage Rating (DC)=50V
C3 C5: library part CMP-06035-004838-1, "Cap Ceramic 1uF 100V X7R ±10% Radial 2.5mm +125°C Automotive Bulk", Capacitance=1uF, Case/Package=Radial, Dielectric=X7R, Max Operating Temperature=125°C, Min Operating Temperature=-55°C, Package Quantity=500, Ratings=AEC-Q200, Resistor Type=Ceramic, Tolerance=10%, Voltage Rating=100V, Height=4mm, Height - Seated (Max)=0.157inch, Lead Diameter=0.5mm, Lead Pitch=0.098inch, Lead/Base Style=Straight, Length=0.217inch, Mount="Through Hole", Packaging=Bulk, Termination=Radial, Voltage Rating (DC)=100V, Width=0.124inch
C4: library part CMP-05427-001780-1, "Aluminum Electrolytic Capacitors (Radial Lead Type) AEC-Q200 Qualified 330uF ±20% 25V", Capacitance=330uF, Case/Package=Radial, Max Operating Temperature=105°C, Min Operating Temperature=-55°C, Package Quantity=200, Ripple Current=310mA, Tolerance=20%, Voltage=25V, Construction=RADIAL, Diameter=8mm, Height=11.5mm, Height - Seated (Max)=0.512inch, Lead Diameter=0.6mm, Lead Pitch=3.5mm, Lead/Base Style=Straight, Length=11.5mm, Life (Hours)=1000Hour, Mount="Through Hole", Number of Pins=2, Packaging=Bulk, Polarity=Polar, REACH SVHC="No SVHC", Ripple Current (AC)=310mA, RoHS Compliant=Yes, Series="Automotive, AEC-Q200, HD", Termination=Radial, Voltage Rating=25V, Voltage Rating (DC)=25V
C6: library part CMP-06035-020669-1, "Cap Ceramic Monolithic 33nF 100V 10% Thru-Hole Bulk", Capacitance=33nF, Case/Package=Radial, Dielectric=X7R, Max Operating Temperature=125°C, Min Operating Temperature=-55°C, Package Quantity=2000, Ratings=AEC-Q200, Resistor Type=Ceramic, Tolerance=10%, Voltage Rating=100V, Height=3.5mm, Height - Seated (Max)=0.138inch, Lead Diameter=0.5mm, Lead Pitch=0.197inch, Lead/Base Style="Formed Leads", Length=0.157inch, Mount="Through Hole", Packaging="Tape and Reel", Termination=Radial, Voltage Rating (DC)=100V, Width=0.098inch
C7 C8 C9 C10 C11: library part CMP-2000-07185-1, "Capacitor, Tantalum, Radial, Solid Tantalum, Conformal, Dipped, 4.7 uF, +/- 10%, 35 V, -55 to 125 degC, 2-Pin THD (T352), RoHS, Bulk", Capacitance Value=10uF, Case Style=Dipped, Manufacturer=KEMET, Maximum Operating Temperature=125°C, Minimum Operating Temperature=-55°C, Operating Temperature=-55to125°C, Package Description="2-Pin Through Hole Device, Body 5.5 x 0.5 mm, Height 11.7 mm", Package Reference=T352, Tolerance=10%, Voltage=35Vdc, Voltage Rating DC=35V, Category=CapacitorTantalumSolidRadial, Datasheet URL=http://capacitoredge.kemet.com/capedge2/DataSheet/Datasheet-T352E475K035AT.pdf?pn=T352E475K035AT, Datasheet Version=05/2016, Lead Pitch For Radial=5.08mm, Manufacturer URL=http://www.kemet.com/, Mounting Technology=ThroughHole, Package URL=http://capacitoredge.kemet.com/capedge2/DataSheet/Datasheet-T352E475K035AT.pdf?pn=T352E475K035AT, Packaging=Bulk, PartNumber=T352E475K035AT, Product Diameter=5.5(Max)mm, Product Height=11.7(Max)mm
C15 C16: library part CMP-06035-011084-1, "Cap Ceramic Monolithic 100nF 100V 10% Thru-Hole Bulk", Capacitance=100nF, Case/Package=Radial, Dielectric=X7R, Max Operating Temperature=125°C, Min Operating Temperature=-55°C, Package Quantity=500, Ratings=AEC-Q200, Resistor Type=Ceramic, Tolerance=10%, Voltage Rating=100V, Height=3.5mm, Height - Seated (Max)=0.138inch, Lead Diameter=0.5mm, Lead Pitch=0.197inch, Lead/Base Style="Formed Leads", Length=0.157inch, Mount="Through Hole", Packaging=Bulk, Termination=Radial, Voltage Rating (DC)=100V, Width=0.098inch
D1: library part CMP-12187-000025-1, "DIODE SCHOTTKY 40V 3A DO201AD", Forward Current=3A, Manufacturer=STMicroelectronics, Max Junction Temp=+150°C, Max Repetitive Reverse Voltage=40V, Max Surge Forward Current=80A, Package=DO-201AD, Peak Reverse Current=2mA, Temperature="to +150°C", Automotive=No, Category=Diode, ComponentLink2Description=Datasheet, ComponentLink2URL=https://www.st.com/resource/en/datasheet/1n5822.pdf, Device Class L1="Discrete Semiconductors", Device Class L2=Diodes, Device Class L3="Schottky Diodes", Digikey Description="DIODE SCHOTTKY 40V 3A DO201AD", Height=5.3mm, Lead Free=Yes, Manufacturer Part Number=1N5822, Mouser Description="Schottky Diodes & Rectifiers Vr/40V Io/3A BULK", Octopart=https://octopart.com/1n5822-stmicroelectronics-323225, RoHS=TRUE, Temperature Range High=+150°C
D2: library part CMP-02539-000037-2, "DIODE SCHOTTKY 40V 1A DO204AL", Average Rectified Current=1A, Capacitance=110pF, Forward Voltage=900mV, Max Forward Surge Current (Ifsm)=25A, Max Operating Temperature=125°C, Max Repetitive Reverse Voltage (Vrrm)=40V, Min Operating Temperature=-65°C, Package Quantity=1, Peak Reverse Current=1mA, Current=1A, Current Rating=1A, Diameter=2.7mm, Element Configuration=Single, Forward Current=1A, Height=2.7mm, Lead Free="Lead Free", Length=5.2mm, Max Reverse Voltage (DC)=40V, Mount="Through Hole", Number of Pins=2, Output Current=1A, Packaging="Tape and Reel", Peak Non-Repetitive Surge Current=25A, Polarity=Standard, Radiation Hardening=No, Voltage=40V, Voltage Rating (DC)=40V, Width=2.7mm
E1: library part CMP-1559-01768-1, "OMNIMATE Signal - series LM", Colour=Orange, Manufacturer=Weidmueller, Rated_current_use_group_B_UL_1059="15 A", Rated_voltage_for_surge_voltage_class_pollution_degree_II_2="630 V", Rated_voltage_use_group_B_UL_1059="300 V", UL_94_flammability_rating=V-0, ComponentLink1Description="Manufacturer URL", ComponentLink1URL=http://www.weidmueller.com/, ComponentLink2Description="URL Link1", ComponentLink2URL=http://catalog.weidmueller.com/catalog/Start.do?localeId=en&ObjectID=1716090000, Contact_material=Cu-Leg, Contact_surface=tinned, Insulating_material="Wemid (PA)", Mounting_onto_the_PCB="Solder connection", No_of_poles=3, PackageReference=LM_5_08_90_03, Packaging=Box, PartNumber=1716090000, Pitch_inch="0,2 inch", Pitch_mm="5,08 mm", Qty="500 PCS", Revision=V1, Short_text_for_material="LM 5.08/03/90 3.5SN OR BX", Side_termination_characteristic="closed side", Solder_pin_length_mm="3,5 mm", Solid_max_H05_07_V_U="2,5 mm²", Solid_min_H05_07_V_U="0,2 mm²", Wire_cross_section_AWG_max_UL_1059="AWG 14", Wire_cross_section_AWG_min_UL_1059="AWG 24"
In1: library part CMP-1559-01745-1, "OMNIMATE Signal - series LM", Colour=Orange, Manufacturer=Weidmueller, Rated_current_use_group_B_UL_1059="15 A", Rated_voltage_for_surge_voltage_class_pollution_degree_II_2="630 V", Rated_voltage_use_group_B_UL_1059="300 V", UL_94_flammability_rating=V-0, ComponentLink1Description="Manufacturer URL", ComponentLink1URL=http://www.weidmueller.com/, ComponentLink2Description="URL Link1", ComponentLink2URL=http://catalog.weidmueller.com/catalog/Start.do?localeId=en&ObjectID=1715310000, Contact_material=Cu-Leg, Contact_surface=tinned, Insulating_material="Wemid (PA)", Mounting_onto_the_PCB="Solder connection", No_of_poles=2, PackageReference=LM_5_00_90_02, Packaging=Box, PartNumber=1715310000, Pitch_inch="0,197 inch", Pitch_mm="5 mm", Qty="500 PCS", Revision=V1, Short_text_for_material="LM 5.00/02/90 3.5SN OR BX", Side_termination_characteristic="closed side", Solder_pin_length_mm="3,5 mm", Solid_max_H05_07_V_U="2,5 mm²", Solid_min_H05_07_V_U="0,2 mm²", Wire_cross_section_AWG_max_UL_1059="AWG 14", Wire_cross_section_AWG_min_UL_1059="AWG 24"
J1: library part CMP-04767-000028-2, "CONN RCP USB2.0 TYP C 24P SMD RA", Current Rating=1.25A, Max Operating Temperature=85°C, Min Operating Temperature=-40°C, Voltage Rating=30V, Contact Material="Gold, Nickel", Gender=Receptacle, Height=3.36mm, NexarPartId=117190526, Number of Contacts=16, USB Standard="USB 2.0"
J2: library part CMP-0256-00001-1, "3 Conductor Power Jack, 2 break 2 aux contacts", ComponentLink1Description="Manufacturer URL", ComponentLink1URL=http://kycon.com/, ComponentLink2Description=Datasheet, ComponentLink2URL=http://anacapa.kycon.com/Catalog_PDF/KLDX_0202.pdf, Contact Finish=Brass, Mounting Technology="Through Hole", PackageDescription="Jack, 9 x 14.5 mm Body, 2.5 mm Center Pin Diameter", PackageReference=KLDX-0202-B, PartNumber=KLDX-0202-B
J4: library part CMP-00671-05399696-1, "M20-9990445 Conn Unshrouded Header HDR 4 POS 2.54mm Solder ST Thru-Hole Bulk/Loose", Case/Package=SIL, Color=Black, Contact Resistance=25mΩ, Current Rating=3A, Insulation Resistance=10GΩ, Max Operating Temperature=105°C, Min Operating Temperature=-40°C, Voltage Rating (AC)=750V, Connector Type="Male Pin", Contact Material="Brass, Bronze, Gold, Nickel", Contact Mating Length=6.096mm, Contact Plating=Gold, Depth=2.54mm, Gender=Male, Height=2.54mm, Housing Color=Black, Housing Material=Nylon, Lead Pitch=2.54mm, Length=10.16mm, Max Current Rating=3A, Mount="Through Hole", NexarPartId=5399696, Number of Contacts=4, Number of Pins=4, Number of Positions=4, Number Of Rows=1, Orientation=Straight, Pitch=2.54mm, Radiation Hardening=No, REACH SVHC="No SVHC", RoHS=Compliant, Termination=Solder, Voltage Rating (DC)=750V, Weight=45.359237g, Width=12.7mm
J6 J7: library part CMP-02766-001388-1, "CONN HEADER VERT 4POS 2.54MM", Color=Black, Max Current Rating=7.6A, Max Operating Temperature=105°C, Max Voltage Rating (AC)=550V, Min Operating Temperature=-55°C, Package Quantity=1, Connector Type="Male Pin", Contact Material=Bronze, Contact Mating Length=0.23inch, Contact Plating=Tin, Contact Type="Male Pin", Depth=2.54mm, Gender=Male, Housing Color=Black, Housing Material=Polyester, Lead Free="Lead Free", Length=10.16mm, Mount="Through Hole", Number of Contacts=4, Number of Positions=4, Number Of Rows=1, Orientation=Straight, Packaging=Bulk, Pitch=2.54mm, Radiation Hardening=No, REACH SVHC="No SVHC", RoHS Compliant=Yes, Series=TSW, Termination=Solder, Width=2.54mm
J8 J9: library part CMP-02766-001466-1, "CONN HEADER VERT 15POS 2.54MM", Color=Black, Connector Type="Male Pin", Contact Material=Bronze, Contact Mating Length=0.23inch, Contact Plating=Tin, Contact Type="Male Pin", Gender=Male, Height=2.54mm, Housing Color=Black, Housing Material=Plastic, Lead Free="Lead Free", Length=38.1mm, Mount="Through Hole", Number of Contacts=15, Number of Positions=15, Number Of Rows=1, Packaging=Bulk, Pitch=0.1inch, Radiation Hardening=No, REACH SVHC="No SVHC", RoHS Compliant=Yes, Series=TSW, Termination=Solder, Width=2.54mm
L1 L2 L3: library part RLB0608-1R8ML, "No Description Available", Manufacturer_Name="Bourns Electronics", Copyright="Copyright (C) 2025 Ultra Librarian. All rights reserved.", Manufacturer_Part_Number=RLB0608-1R8ML
"LED 3V3" "LED 5V" "LED 12V" "LED ESP32": library part CMP-1488-00009-2, Case/Package=Radial, Color=Blue, Forward Current=100mA, Forward Voltage=3.2V, Max Operating Temperature=85°C, Max Reverse Voltage (DC)=5V, Min Operating Temperature=-40°C, Test Current=20mA, Dominant Wavelength=470nm, Height=8.6mm, Length=5mm, Lens Size=5mm, Lens Style="Circular, Diffused, Round", Luminous Intensity=500mcd, Mount="Through Hole", NexarPartId=29717812, Packaging=Bulk, Peak Wavelength=465nm, REACH SVHC=Unknown, RoHS=Compliant, Viewing Angle=40°, Wavelength=470nm, Width=5mm
MD1: library part CMP-194065-000027-1, "RX TXRX MOD WIFI TRACE ANT SMD"
P1 P2: library part CMP-1676-00001-5, "Male Header, Pitch 2.54 mm, 1 x 3 Position, Height 8.38 mm, Tail Length 3.18 mm, RoHS, Bulk", Colour=Black, Current Rating="4 A", Manufacturer=Molex, Max Operating Temperature="75 degC", Min Operating Temperature="0 degC", Package Quantity=1, Voltage Rating="250 V", ComponentLink1Description="Manufacturer URL", ComponentLink1URL=http://www.molex.com/, ComponentLink2Description=Datasheet, ComponentLink2URL=http://www.molex.com/pdm_docs/sd/022284033_sd.pdf, Contact Finish=Gold, Contact Material=Brass, Contact Plating=Gold, DatasheetVersion="Rev. G, 01/2012", Height="8.38 mm", Lead Pitch="0.1 inch", Length="7.62 mm", Mount="Through Hole", Mounting Technology="Through Hole", PackageDescription="Male Header, Pitch 2.54 mm, 1 x 3 Position, Height 8.38 mm, Tail Length 3.18 mm", PackageReference=22-28-4033, Packaging=Bulk, Pins=3, REACH SVHC=Unknown, RoHSCompliant=true, Rows=1
Q1 Q2 Q5: "Bipolar (Bjt) Single Transistor, Npn, 30 V, 500 Mw, 800 Ma, 100 Rohs Compliant: Yes", Case/Package=TO-18, Collector Emitter Breakdown Voltage=30V, Manufacturer=Multicomp, Manufacturer Part Number=2N2222, Max Collector Current=800mA, Max Operating Temperature=200°C, Max Power Dissipation=500mW, Supplier Part Number=87K2254, Transition Frequency=250MHz, Body Material=Metal, Category=BJTs, Collector Emitter Voltage (VCEO)=30V, ComponentLink1Description=https://datasheet.octopart.com:443/2N2222-Multicomp-datasheet-632794.pdf?src-supplier=IHS, ComponentLink1URL=https://datasheet.octopart.com:443/2N2222-Multicomp-datasheet-632794.pdf?src-supplier=IHS, ComponentLink2Description=https://datasheet.octopart.com:443/2N2222-Multicomp-datasheet-12475390.pdf?src-supplier=Newark, ComponentLink2URL=https://datasheet.octopart.com:443/2N2222-Multicomp-datasheet-12475390.pdf?src-supplier=Newark, hFE Min=30, Lifecycle Status=Production, Number of Elements=1, Number of Terminals=3, Pins=3, Polarity=NPN, Power Dissipation=500mW, Pricing="1=0,685, 10=0,562, 50=0,429, 100=0,379, 500=0,361, 1000=0,311, 5000=0,286, 10000=0,274 (USD)", REACH SVHC=No, RoHS=Compliant, Stock=14638, Supplier=Newark
Q3 Q6: Base Emitter On Voltage="- 1.2 V", Collector Base Breakdown Voltage="- 30 V", Collector Base Capacitance="12 pF", Collector Base Cutoff Current="- 100 nA", Collector Current="- 800 mA", Collector Emitter Breakdown Voltage="- 25 V", Collector Emitter Saturation Voltage="- 0.7 V", DC Current Gain="100 - 630", Emitter Base Breakdown Voltage="- 5 V", Junction Temperature="150 °C", Peak Collector Current="- 1 A", Storage Temperature Range="- 55 to + 150 °C", Total Power Dissipation="625 mW", Collector Base Voltage="- 30 V", Collector Emitter Voltage="- 25 V", ComponentLink1Description=Suplier, ComponentLink1URL=https://co.mouser.com/ProductDetail/onsemi-Fairchild/BC328?qs=UMEuL5FsraCayeUWgO8mfw%3D%3D&srsltid=AfmBOorf5xZwroEOplrd7QqiXYxDeoimh0FrK1nMyUL-RBvrlmJFWC5R, ComponentLink2Description="Datasheet (1)", ComponentLink2URL=https://www.mouser.com/catalog/specsheets/fairchild%20semiconductor_bc327.pdf?_gl=1*1ayinll*_gcl_au*MTU3NTQyMTg3NS4xNzU3MzcyNzA1LjE4NDA3OTc0MTAuMTc2MDM4ODMxNC4xNzYwMzg4NDM1*_ga*MTE1MjgxNTUzOS4xNzU3MzcyNzA3*_ga_15W4STQT4T*czE3NjAzOTI0MjgkbzEyJGcxJHQxNzYwMzkzNzQyJGo2MCRsMCRoMA.., ComponentLink3Description="datasheet (2)", ComponentLink3URL=https://www.alldatasheet.es/datasheet-pdf/view/281199/SEMTECH_ELEC/BC328.html, Emitter Base Voltage="- 5 V", Gain Bandwidth Product="100 MH"
Q4: library part CMP-00196-65874408-1, "IRFZ44NLPBF Single N-Channel 55 V 17.5 mOhm 63 nC HEXFET® Power Mosfet - TO-262", Case/Package=TO-262, Continuous Drain Current (ID)=49A, Drain to Source Breakdown Voltage=55V, Drain to Source Resistance=17.5mΩ, Gate to Source Voltage (Vgs)=20V, Input Capacitance=1.47nF, Max Junction Temperature (Tj)=175°C, Max Power Dissipation=3.8W, Min Operating Temperature=-55°C, Package Quantity=1000, Power Dissipation=110W, Resistance=17.5MΩ, Threshold Voltage=4V, Current Rating=49A, Drain to Source Voltage (Vdss)=55V, Dual Supply Voltage=55V, Element Configuration=Single, Fall Time=45ns, Height=9.65mm, Lead Free="Contains Lead, Lead Free", Length=10.668mm, Lifecycle Status=Production, Max Operating Temperature=175°C, Mount="Through Hole", NexarPartId=65874408, Nominal Vgs=4V, Number of Channels=1, Number of Elements=1, Number of Pins=3, On-State Resistance=17.5mΩ, Packaging=Bulk, Radiation Hardening=No, Rds On Max=17.5mΩ, REACH SVHC="No SVHC", Rise Time=60ns, RoHS=Compliant, Schedule B="8541290080, 8541290080", Termination="Through Hole", Turn-Off Delay Time=44ns, Turn-On Delay Time=12ns, Voltage Rating (DC)=55V, Width=4.826mm
R1 R2 R3 R6 R7 R8 R9 R10 R11 R12 R13 R14 R15 R16 R17 R18 R19 R20 R21 R22 R23 R24 R25 R31 R32: library part CMP-00621-25629781-1, "Resistor, 1 kOhm, ± 5%, 1 W, Axial Leaded, Metal Film, High Power Flame Proof", Case/Package=Conformal, Max Operating Temperature=155°C, Min Operating Temperature=-55°C, Power Rating=1W, Resistance=1kΩ, Temperature Coefficient=100ppm/°C, Tolerance=5%, Composition="Metal Film", Diameter=2.4mm, Lead Free="Lead Free", Length=6.3mm, Military Standard=Not, Mount="Through Hole", Radiation Hardening=No, RoHS=Compliant, Schedule B="8533210090, 8533210090", Termination=Axial
SW1 SW2: library part CMP-1684-00021-1, "Tact Switch, SPST-NO, 0.05 A, -35 to 85 degC, 4-Pin THD, RoHS, Bulk", Actuator Color=Black, Contact Rating @ Voltage=0.05A@24VDC, Dielectric Strength=500VAC, Manufacturer="TE Connectivity", Maximum AC Voltage Rating=N/A, Maximum Contact Resistance=100mOhm, Maximum DC Voltage Rating=24V, Minimum Insulation Resistance=100MOhm, Operating Temperature=-35to85C, Package Description="4-Pin Through Hole Device, Body 5.99 x 5.99 mm, Pitch 6.5 mm", Package Reference=THD, Actuator Length=1.4mm, Actuator Material=PolybutyleneTerephthalate, Actuator Style=RoundButton, Base Material=N/A, Body Orientation=Straight, Bushing Type=Unthreaded, Contact Material=CopperAlloy, Contact Plating=Silver, Datasheet URL=http://www.te.com/commerce/DocumentDelivery/DDEController?Action=showdoc&DocId=Customer+Drawing%7F1825910%7FC9%7Fpdf%7FEnglish%7FENG_CD_1825910_C9.pdf%7F1825910-6, Datasheet Version="Rev. C9", Dimension=5.99x5mm, Electrical Life=100000Cycles, Family=1825910, Function=MomentaryContact, Housing Material=N/A, Illumination=N/R, Manufacturer URL=http://www.te.com, Mechanical Life=100000Cycles, Mounting=ThroughHole, Packaging=N/A, Part No=1825910-6, Pole Throw Configuration=SPST, Product Weight=N/A, RoHS=Yes, Seal Description=N/A, Seal Location=N/A, Switch Configuration=OFF(ON), Terminal Type=PCPins, Thread Size=N/R
U1: library part CH340, Brown-out detector threshold voltage="2.3 - 2.9 (typ 2.6) V", Clock frequency (at pin XI)="11.98 - 12.02 (typ 12.00) MHz", High input voltage="2.0 - VCC+0.5 V", High output voltage="VCC-0.5 V", IO pin voltage, reference to GND pin="-0.5 - VCC+0.5 V", Low input voltage="-0.5 - 0.7 V", Low output voltage="0.5 V", Operating current="12 - 30 mA", Operating Temperature="-40 - 85 ºC", Power-on reset time="20 - 50 ms", Sleeping current (3V operation)="50 - 80 uA", Sleeping current (5V operation)="150 - 200 uA", Storage temperature="-40 - 125 ºC", Supply rail voltage (3V operation)="3.3 - 3.8 V", Supply rail voltage (5V operation)="4.5 - 5.5 V", Supply rail voltage, reference to GND pin="-0.5 - 6.5 V", ComponentLink1Description=datasheet, ComponentLink1URL=https://www.mouser.com/datasheet/2/306/CH340DS1-2487512.pdf?srsltid=AfmBOooaCm0bY9ghGhDfZzr0yr_8N53BDd8jqQWjHYTFMZadGDepO_U8, ComponentLink2Description="Sparkfun module", ComponentLink2URL=https://co.mouser.com/ProductDetail/SparkFun/DEV-15096?qs=l7cgNqFNU1ix43QyKol73A%3D%3D, Internal pull-down strength="-50 - -300 (typ -150) µA", Internal pull-up strength="3 - 300 (typ 150) µA"
U2: Feedback Voltage="0.776 - 0.824 (typ 0.8) V", Input Voltage Range="Wide 5V to 32V", Output Current Capability="5A Constant", Quiescent Supply Current="3 - 5 mA", Shutdown Supply Current="60 - 200 uA", Switch Current Limit="8 A", Switching Frequency="Fixed 300KHz", ComponentLink1Description=Suplier, ComponentLink1URL=https://www.lcsc.com/product-detail/C73332.html?s_z=n_xl4005, ComponentLink2Description="datasheet (1)", ComponentLink2URL=https://www.lcsc.com/datasheet/C73332.pdf, ComponentLink3Description="datasheet (2)", ComponentLink3URL=https://www.sigmaelectronica.net/wp-content/uploads/2022/11/XL4005-XLSEMI.pdf, ComponentLink4Description="datasheet (3)", ComponentLink4URL=https://www.alldatasheet.es/datasheet-pdf/view/763182/ETC2/XL4005E1.html, Efficiency="90 %", Maximum Duty Cycle=100%, Minimum Drop Out=0.6V, Output Adjustable="from 0.8V to 30V"
U3 U4: library part CMP-0062-02494-3, "800mA Low-Dropout Linear Regulator, 3-pin TO-220, Pb-Free", Manufacturer="Texas Instruments", PackageTopMarking=NSUZXYTTE#*LM1117T*3.3, PowerWise=N, ComponentLink1Description="Datasheet URL", ComponentLink1URL=http://www.ti.com/general/docs/lit/getliterature.tsp?genericPartNumber=LM1117-N&fileType=pdf, CompType="LDO IC", PackageDescription="TO-220, Molded, 3 Lead, Straight", PackageReference=NDE0003A, PinCount=3, RoHS=Y
U5: Analog supply current (including regulator)="Normal 1400 uA; Power down 0.3 uA", Crystal or external clock frequency="1 - 20 (typ 11.0592) MHz", Digital supply current="Normal 100 uA; Power down 0.2 uA", Operation temperature range="-40 ~ +85°C", Power supply rejection (Gain = 128，RATE = 0)="100 dB", Power supply voltage (DVDD, AVDD, VSUP)="2.6 - 5.5 V", Temperature drift (Gain [Gain = 128])="±5 nV/°C", Temperature drift (Input offset[Gain = 128])="±6 nV/°C", Common mode input="AGND+1.2 - AVDD-1.3 V", ComponentLink1Description=Suplier, ComponentLink1URL=https://www.lcsc.com/product-detail/C6705483.html?s_z=n_hx711, ComponentLink2Description=datasheet, ComponentLink2URL=https://www.lcsc.com/datasheet/C6705483.pdf, differential input channels="Two selectable", Full scale differential input range=±0.5(AVDD/GAIN)V, Input common mode rejection (Gain = 128，RATE = 0)="100 dB", Input noise (Gain = 128，RATE = 0)="50 nV (rms)", Input noise (Gain = 128，RATE = DVDD)="90 nV (rms)", Input offset drift (Gain = 64)="0.4 mV", Input offset drift (Gain = 128)="0.2 mV", Output data coding="2’s complement (800000 - 7FFFFF HEX)", Output data rate="10, 80 Hz", Output settling time (RATE = 0)="400 ms", Output settling time (RATE = DVDD)="50 ms", PGA with selectable gain="32, 64 and 128 8On-chip active low noise )", Reference bypass="1.25 V", supply rejection="Simultaneous 50 and 60Hz"

## Via types
v1: diameter 1.2, hole 0.42, Top Layer to Bottom Layer, tented both sides, 63 vias
v2: diameter 1.27, hole 0.711, Top Layer to Bottom Layer, 5 vias
v3: diameter 1.27, hole 0.711, Top Layer to Bottom Layer, tented both sides, 4 vias
v4: diameter 5.3, hole 3, Top Layer to Bottom Layer, 4 vias

## Nets (pads, with @x,y where several pads share a name; then routed paths per layer and width w, separated by ;. In a path a pad name is that pad's centre, name@x,y a point inside that pad or via, vN(x,y) a via of type N, cw(c..) or ccw(c..) an arc to the next point about the centre after c; other vN are vias at no path point)
3V3_LDO_EPS32: C10.1 MD1.2 R3.1 R15.1 U4.2
  other v1: 54.092,55.79
  other v2: 39.624,57.912
3V3_LDO_Sens: C8.1 J6.1 J6.2 J7.1 Q6.3 R16.1 R19.1 U3.2 U5.1 U5.16 | length 26.3
  Top Layer w0.254: R19.1 14.986,18.034 16.286,16.734 23.652,16.734 25.146,15.24 30.226,15.24 30.541,15.555 30.541,16.4 U5.16 ; Q6.3 28.194,11.176 28.956,11.938 30.035,11.938 30.607,11.366 U5.1
  other v1: 9.092,15.79 29.092,15.79 49.092,15.79 79.092,15.79 89.092,15.79 74.092,25.79 84.092,25.79
  other v2: 72.39,14.732
5V_DC-DC: C4.2 C5.1 C6.1 C7.1 L1.1 L2.1 L3.1 R6.1 R14.1 U3.3 V+Cnv.1
  other v1: 79.092,45.79 89.092,45.79 84.092,55.79 69.092,65.79 79.092,65.79 89.092,65.79
  other v2: 80.264,50.8
5V_EXTERN: J4.1 V+Ext.1 | length 5.1
  Top Layer w0.5: V+Ext.1 J4.1
5V_Winner: 5VWin.2 C9.1 U1.16 U4.3 V+Cnv.2 V+Ext.2 V+USB.1 | length 8.5
  Top Layer w0.254: U1.16 12.446,44.196 13.462,45.212 16.51,45.212 17.018,45.72 V+USB.1
  other v1: 39.092,65.79
  other v2: 7.62,56.896
+12_Vin: C2.2 C3.1 D2.1 E1.A1 In1.A1 J2.1 Q3.3 R9.1 R13.1 U2.4 U2.5 | length 27.4
  Top Layer w0.254: Q3.3 19.05,68.834 19.05,54.356 19.558,53.848 27.352,53.848 R9.1
  other v1: 19.092,75.79 29.092,75.79 24.092,85.79 34.092,85.79 44.092,85.79 54.092,85.79 64.092,85.79 84.092,85.79 19.092,95.79 29.092,95.79 39.092,95.79 49.092,95.79 59.092,95.79 69.092,95.79 79.092,95.79
  other v2: 34.798,79.756
AVDD: C11.1 Q6.1 R18.2 U5.3 | length 27.6
  Top Layer w0.254: C11.1 11.658,11.964 11.658,14.706 R18.2 11.684,14.732 12.954,16.002 22.86,16.002 25.146,13.716 Q6.1 31.496,13.716 33.147,12.065 U5.3
BASE: Q6.2 U5.2 | length 6.7
  Top Layer w0.254: Q6.2 31.474,12.446 31.877,12.043 U5.2
D+: J1.A6 J1.B6 U1.5 | length 16.2
  Top Layer w0.117: J1.A6@6.723,38.862 5.842,38.862 5.588,38.608 5.588,38.1 5.83,37.858 J1.B6 6.819,37.95 7.287,37.95 7.312,37.975 16.27,37.975 18.028,36.217 18.028,35.59 17.959,35.522 U1.5
  Top Layer w0.254: J1.A6@6.723,38.862 J1.A6
D-: J1.A7 J1.B7 U1.6 | length 17.2
  Top Layer w0.117: J1.B7 7.886,39.358 8.128,39.116 8.128,38.608 7.878,38.358 J1.A7 6.819,38.266 7.287,38.266 7.312,38.241 16.381,38.241 18.294,36.328 18.294,35.59 18.363,35.522 U1.6
DTR: Q2.1 R1.1 U1.13 | length 28.9
  Top Layer w0.254: U1.13 16.256,42.147 17.509,40.894 30.48,40.894 36.576,34.798 R1.1
  Bottom Layer w0.254: Q2.1 36.068,30.734 36.576,31.242 R1.1
EN: C1.1 MD1.3 Q1.3 R3.2 SW2.2 | length 58.1
  Top Layer w0.254: C1.1 28.368,46.402 R3.2 30.814,47.752 35.638,47.752 ; Q1.3 35.979,46.825 35.979,47.411 35.638,47.752 ; MD1.3 55.348,45.696 54.864,45.212 41.148,45.212 38.608,47.752 35.638,47.752
  Bottom Layer w0.254: SW2.2 8.906,44.704 24.384,44.704 24.892,44.196 C1.1
FB_XL4005E1: C6.2 R7.2 R8.1 U2.2 | length 27.9
  Top Layer w0.254: U2.2 90.346,79.326 91.44,78.232 91.44,75.906 ; R7.2 R8.1 90.932,65.198 90.932,67.748 91.44,68.256 91.44,75.906 ; C6.2 91.44,75.906
GND: "LED 3V3.2" "LED 5V.2" "LED 12V.2" "LED ESP32.2" C1.2 C2.1 C3.2 C4.1 C5.2 C7.2 C8.2 C9.2 C10.2 C11.2 C12.2 C15.2 C16.2 C17.1 D1.2 E1.A3 J1.A1-B12 J1.B1-A12 J2.2 J2.3 J3.2 J4.4 J6.3 J6.4 J7.4 J8.2 J9.2 MD1.1 MD1.15 MD1.38 MD1.39 Q4.3 Q5.1 R8.2 R12.2 R17.1 R25.1 R31.2 R32.2 SW1.3 SW2.3 U1.1 U2.1 U3.1 U4.1 U5.5 U5.14 | length 64.9
  Top Layer w0.254: J1.A1-B12 5.232,41.808 4.195,40.771 4.195,36.699 5.486,35.408 J1.B1-A12 7.772,35.408 8.382,34.798 8.382,33.274 7.874,32.766 2.032,32.766 1.306,32.04 SW1.3 2.778,28.194 7.62,28.194 12.446,33.02 U1.1 ; J3.2 27.537,18.139 28.449,18.139 28.598,18.288 32.512,18.288 33.147,17.653 U5.14 33.147,14.859 35.687,12.319 U5.5 ; MD1.39@48.768,39.754 MD1.39@50.168,39.754 ; MD1.39@51.568,41.154 51.574,41.148 54.102,41.148 57.888,44.934 MD1.1
  other v1: 84.092,10.79 59.092,20.79 69.092,20.79 79.092,20.79 89.092,20.79 69.092,40.79 79.092,40.79 89.092,40.79 64.092,50.79 74.092,50.79 84.092,50.79 9.092,60.79 39.092,60.79 49.092,60.79 59.092,60.79 79.092,60.79 89.092,60.79 4.092,70.79 14.092,70.79 34.092,70.79 44.092,70.79 74.092,70.79 9.092,80.79 19.092,80.79 29.092,80.79 39.092,80.79 69.092,80.79 14.092,90.79 44.092,90.79 64.092,90.79 74.092,90.79
  other v3: 89.154,76.708
IN_A+: P2.1 R20.1 | length 24.3
  Top Layer w0.254: P2.1 9.144,7.366 14.732,7.366 18.034,4.064 R20.1
IN_A-: P2.2 R21.1 | length 23.7
  Top Layer w0.254: P2.2 6.35,14.732 10.414,10.668 16.51,10.668 19.304,7.874 R21.1
IN_B+: J7.2 R22.1 | length 10.5
  Top Layer w0.254: J7.2 51.562,8.538 54.708,11.684 R22.1
IN_B-: J7.3 R23.1 | length 14.2
  Top Layer w0.254: J7.3 49.022,7.954 R23.1
INNA: C13.2 R21.2 U5.7 | length 6.2
  Top Layer w0.254: R21.2 37.886,7.874 C13.2 38.608,9.652 38.227,10.033 U5.7
INNB: C14.2 R23.2 U5.9 | length 9.7
  Top Layer w0.254: U5.9 39.497,17.399 39.878,17.78 42.672,17.78 43.18,17.272 C14.2 43.902,15.24 R23.2
INPA: C13.1 R20.2 U5.8 | length 12.8
  Top Layer w0.254: R20.2 37.084,4.064 37.552,3.596 C13.1 39.918,3.596 40.386,4.064 40.386,9.144 39.497,10.033 U5.8
INPB: C14.1 R22.2 U5.10 | length 12.3
  Top Layer w0.254: U5.10 38.227,15.113 38.608,14.732 39.878,14.732 41.148,13.462 41.148,11.938 42.124,10.962 C14.1 44.236,10.962 44.958,11.684 R22.2
IO0: C17.2 MD1.25 Q2.3 SW1.2 | length 41.6
  Top Layer w0.254: SW1.2 9.818,27.178 21.336,27.178 22.692,28.534 24.714,28.534 25.291,29.111 28.587,29.111 C17.2 31.353,28.234 31.359,28.24 32.812,28.24 ; Q2.3 33.528,28.956 32.812,28.24 ; MD1.25 41.372,29.498 41.372,28.478 41.134,28.24 32.812,28.24
Net5VWin_1: 5VWin.1 J9.1 | length 4.6
  Top Layer w0.5: J9.1 5VWin.1
NetC15_1: C15.1 U1.4 | length 10.9
  Top Layer w0.254: U1.4 16.256,34.544 17.018,33.782 22.098,33.782 22.646,33.234 C15.1
NetD1_1: D1.1 L1.2 L2.2 L3.2 U2.3 U2.6
  other v1: 74.092,75.79 79.092,75.79
NetD2_2: D2.2 In1.A2 Q4.2 | length 21.5
  Top Layer w0.254: In1.A2@34.022,90.17 In1.A2
  Top Layer w1: Q4.2 18.213,89.258 D2.2 29.868,90.17 In1.A2@34.022,90.17
NetE1_A2: E1.A2 R24.2 | length 12.9
  Top Layer w0.254: E1.A2 10.668,70.104 12.192,71.628 12.192,75.692 13.462,76.962 15.668,76.962 R24.2
NetJ1_A5: J1.A5 R31.1 | length 2.9
  Top Layer w0.254: J1.A5 8.79,39.858 R31.1
NetJ1_B5: J1.B5 R32.1 | length 6.3
  Top Layer w0.254: J1.B5 6.75,36.835 7.367,36.835 9.144,35.058 R32.1
NetJ5_1: J5.1 MD1.5 | length 4.2
  Top Layer w0.254: J5.1 52.578,49.022 52.832,48.768 52.832,47.028 MD1.5
NetJ5_2: J5.2 MD1.4 | length 4.5
  Top Layer w0.254: MD1.4 54.102,47.028 54.102,48.514 55.118,49.53 J5.2
NetJ8_5: J8.5 MD1.26 P2.3 | length 45.4
  Top Layer w0.254: P2.3 7.62,20.574 20.828,20.574 22.86,22.606 J8.5 22.988,25.782 24.026,25.782 25.112,26.868 30.788,26.868 31.756,27.836 41.302,27.836 42.122,28.657 42.122,28.678 42.648,29.204 MD1.26
NetJ8_8: J8.8 MD1.29 U5.12 | length 31.1
  Top Layer w0.254: U5.12 35.687,16.866 33.757,18.796 31.496,18.796 29.718,20.574 29.718,24.892 J8.8 32.258,27.432 44.708,27.432 46.135,28.859 46.135,29.181 MD1.29
NetJ8_9: J8.9 MD1.30 U5.11 | length 30.2
  Top Layer w0.254: U5.11 36.957,16.866 34.519,19.304 32.39,19.304 30.988,20.706 30.988,23.114 32.768,24.894 32.768,25.402 J8.9 34.394,27.028 45.574,27.028 47.405,28.859 47.405,29.181 MD1.30
NetJ8_10: J8.10 MD1.31 P1.3 | length 74.4
  Top Layer w0.254: MD1.31 48.998,27.456 v3(51.308,25.146)
  Sources w0.254: J8.10 35.688,25.782 36.726,25.782 37.66,26.716 49.738,26.716 v3(51.308,25.146)
  Bottom Layer w0.254: J8.10 38.608,22.606 38.608,20.32 39.878,19.05 59.69,19.05 66.548,12.192 66.548,10.414 72.898,4.064 P1.3
NetJ8_11: J8.11 MD1.33 P1.2 | length 70.7
  Top Layer w0.254: v3(51.308,27.178) 51.308,28.194 51.562,28.448 51.562,29.48 MD1.33
  Sources w0.254: J8.11 38.228,25.526 39.266,25.526 40.558,24.234 51.686,24.234 52.22,24.768 52.22,26.266 v3(51.308,27.178)
  Bottom Layer w0.254: J8.11 40.64,23.114 59.436,23.114 70.612,11.938 70.612,10.668 71.12,10.16 72.898,10.16 P1.2
NetJ8_14: J8.14 MD1.36 P1.1 | length 61.4
  Top Layer w0.254: 55.348,28.424 MD1.36
  Bottom Layer w0.254: v3(55.372,27.686) 55.097,27.686 54.693,28.09 48.156,28.09 J8.14 47.498,23.876 60.452,23.876 71.12,13.208 73.66,13.208 77.851,9.017 79.353,9.017 79.502,8.868 79.502,8.531 79.353,8.382 78.127,8.382 77.978,8.233 77.978,8.023 78.127,7.874 80.01,7.874 81.534,6.35 P1.1
NetJ9_4: J9.4 MD1.14 R24.1 R25.2 | length 41.4
  Top Layer w0.254: R24.1 15.748,64.77 16.43,64.088 R25.2 17.78,58.34 17.78,54.864 20.32,52.324 J9.4 20.32,49.784 21.336,48.768 39.914,48.768 41.378,47.304 MD1.14
NetJ9_8: J9.8 MD1.10 R11.2 | length 23